# Altium PCB MSampler3.PcbDoc
Units mm, origin at the board's own origin, x right, y up, seen from the top; angles counter-clockwise.
Board outline 50 x 50 mm, 4 copper layers (Top Layer, GND, Signal Layer 1, Bottom Layer), stack 0.778 mm thick; 179 components, 104 nets, 572 pads, 261 vias.
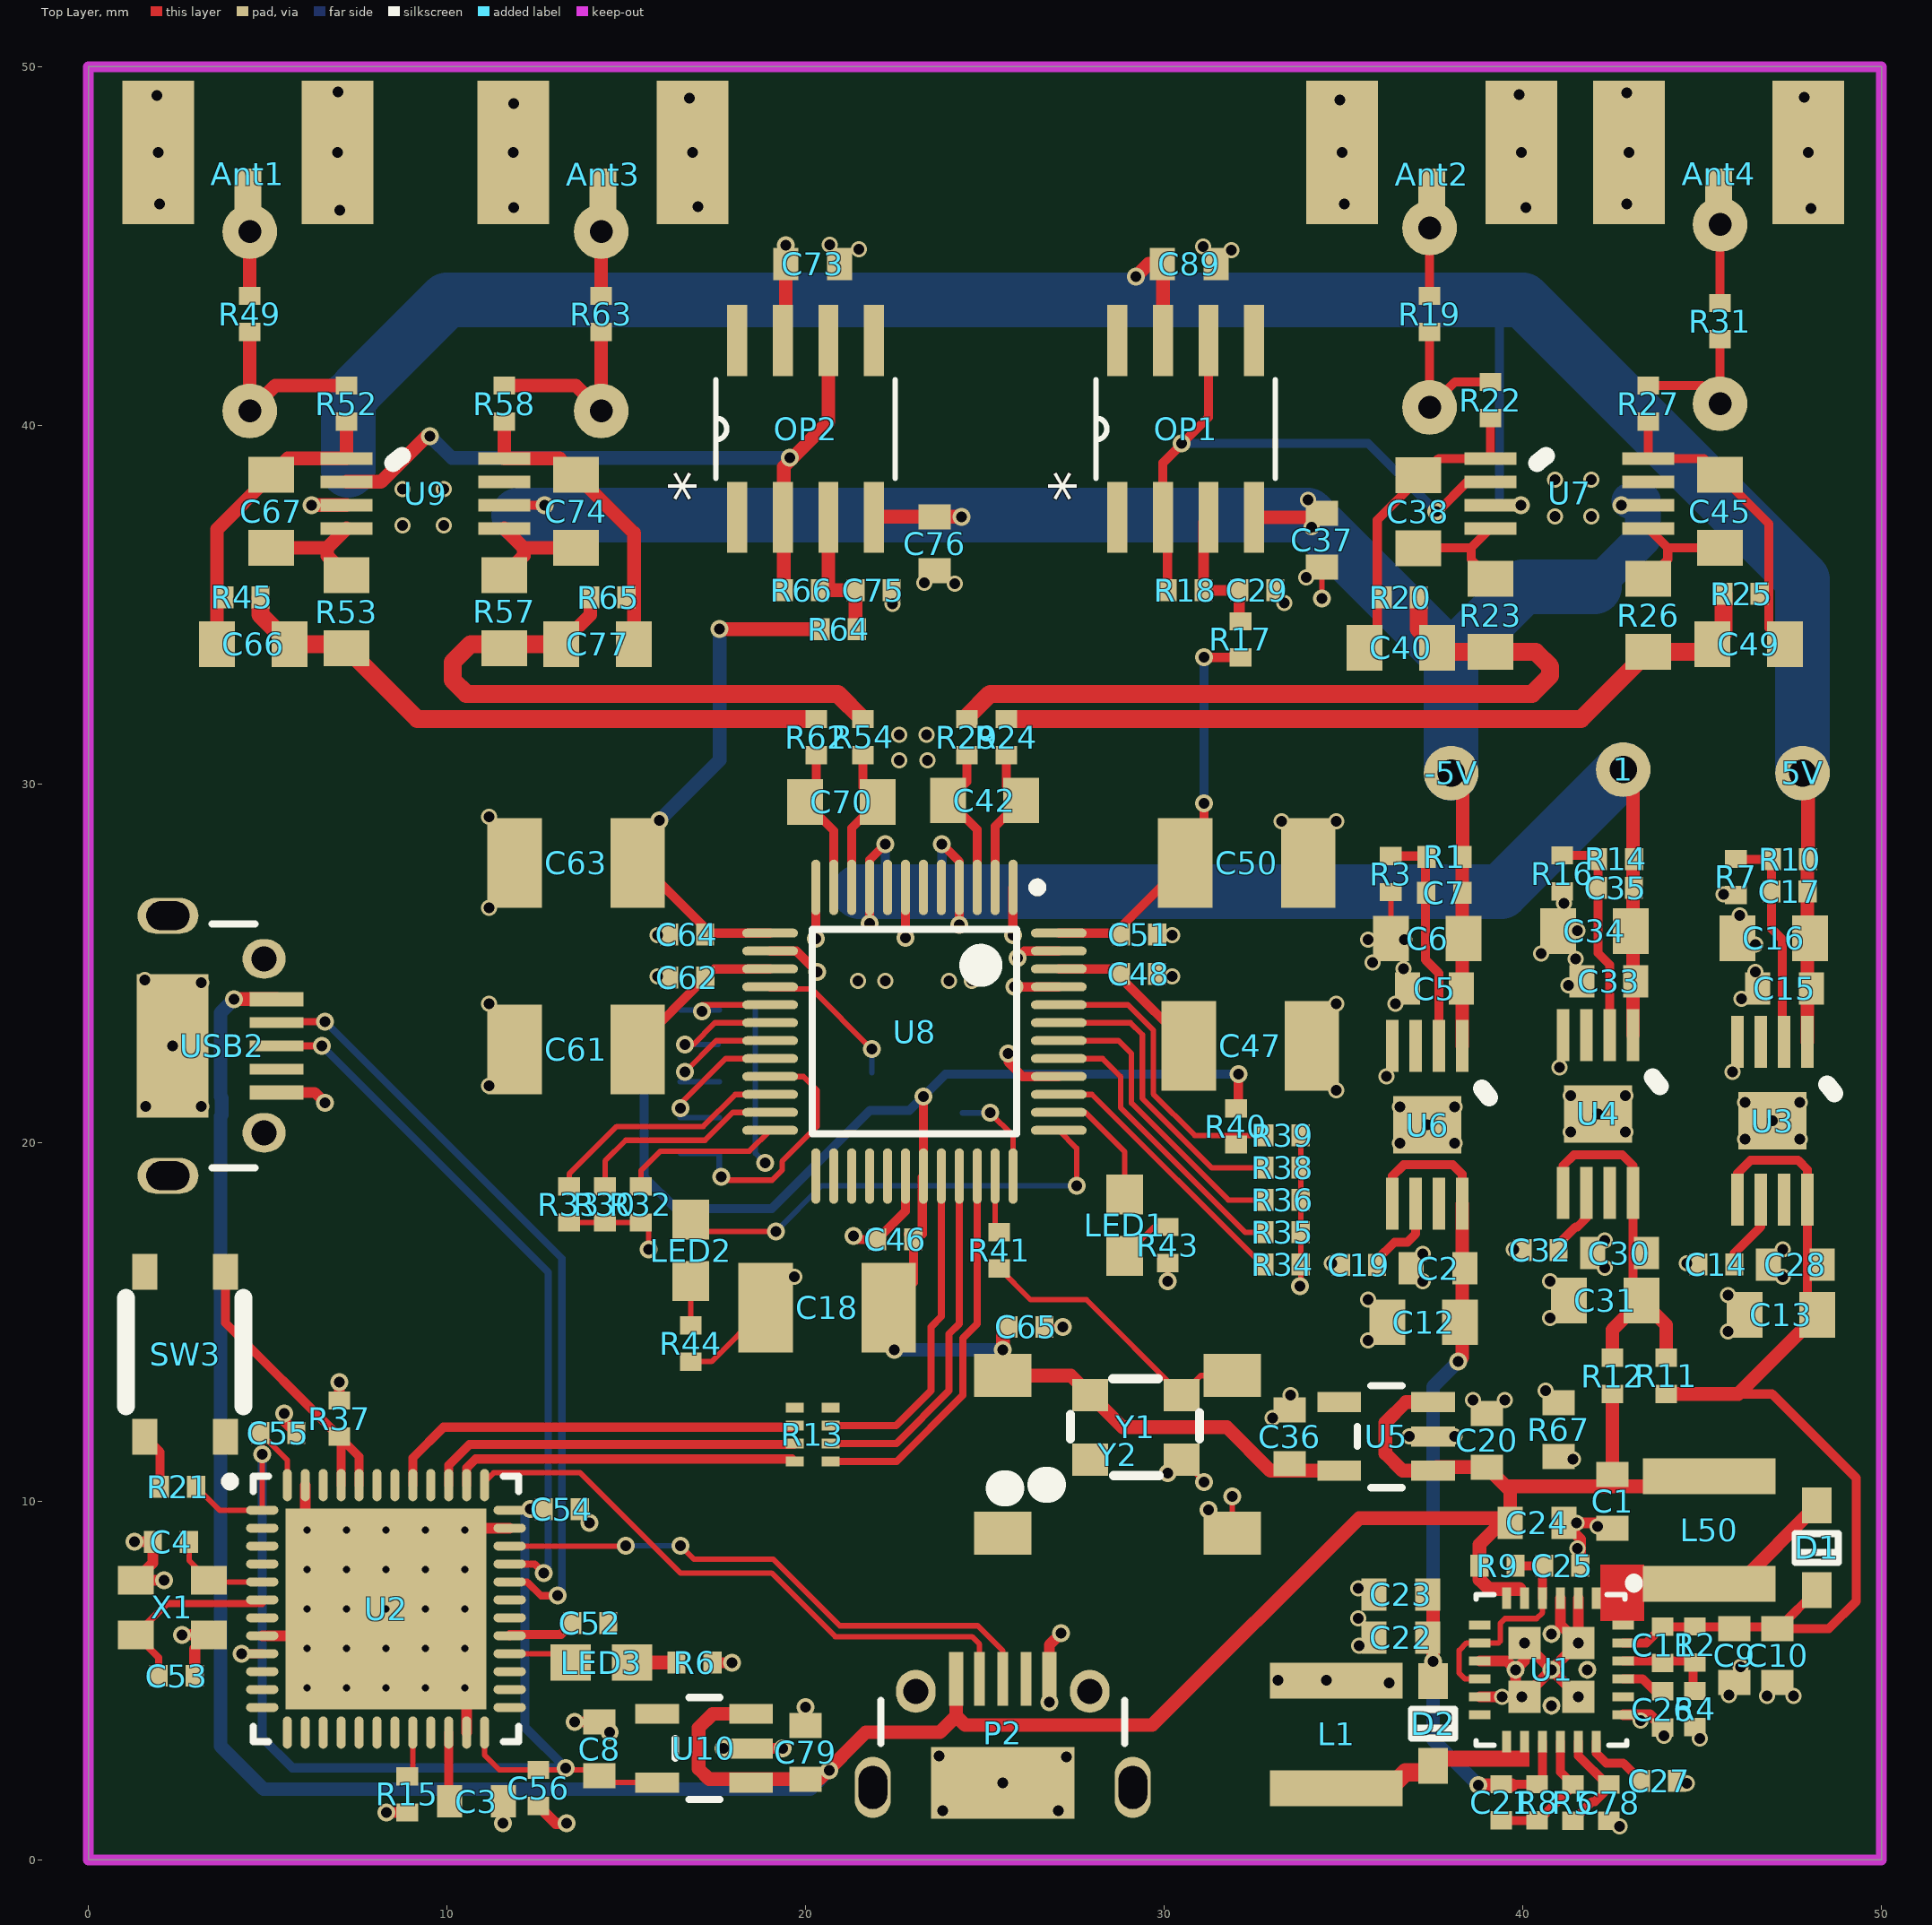
[diagram p0: Top Layer view]
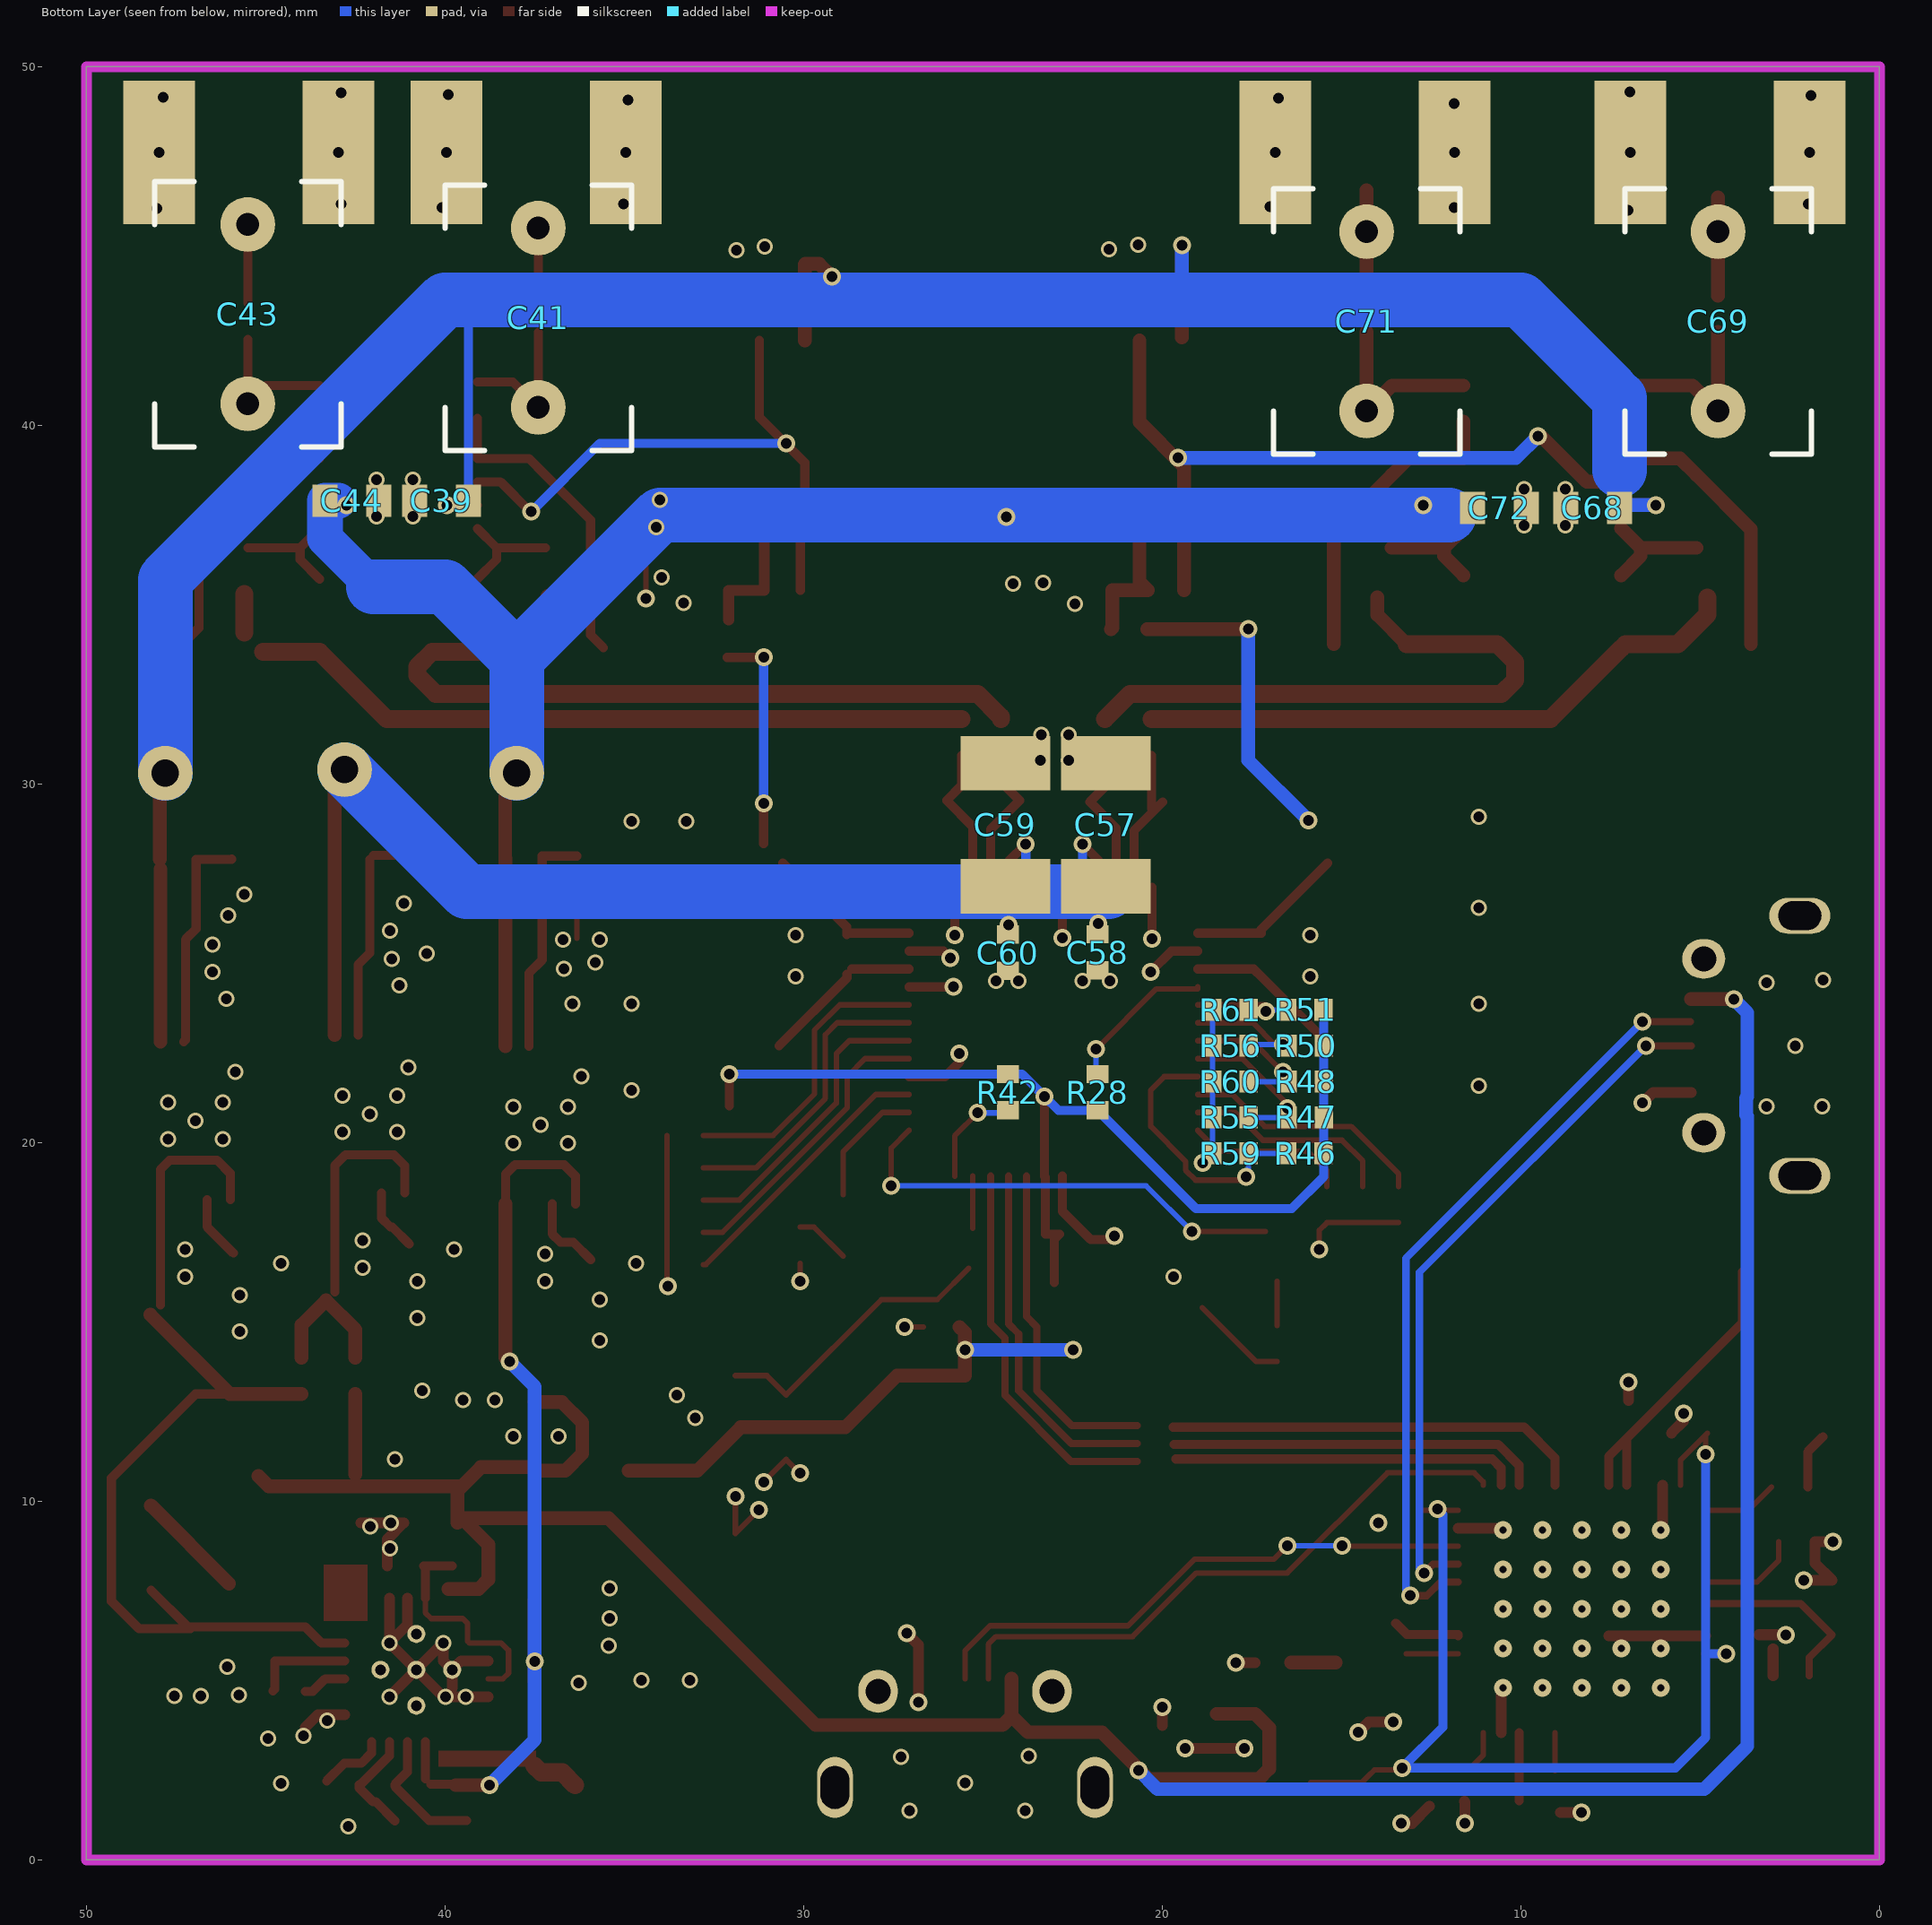
[diagram p1: Bottom Layer view, seen from below]
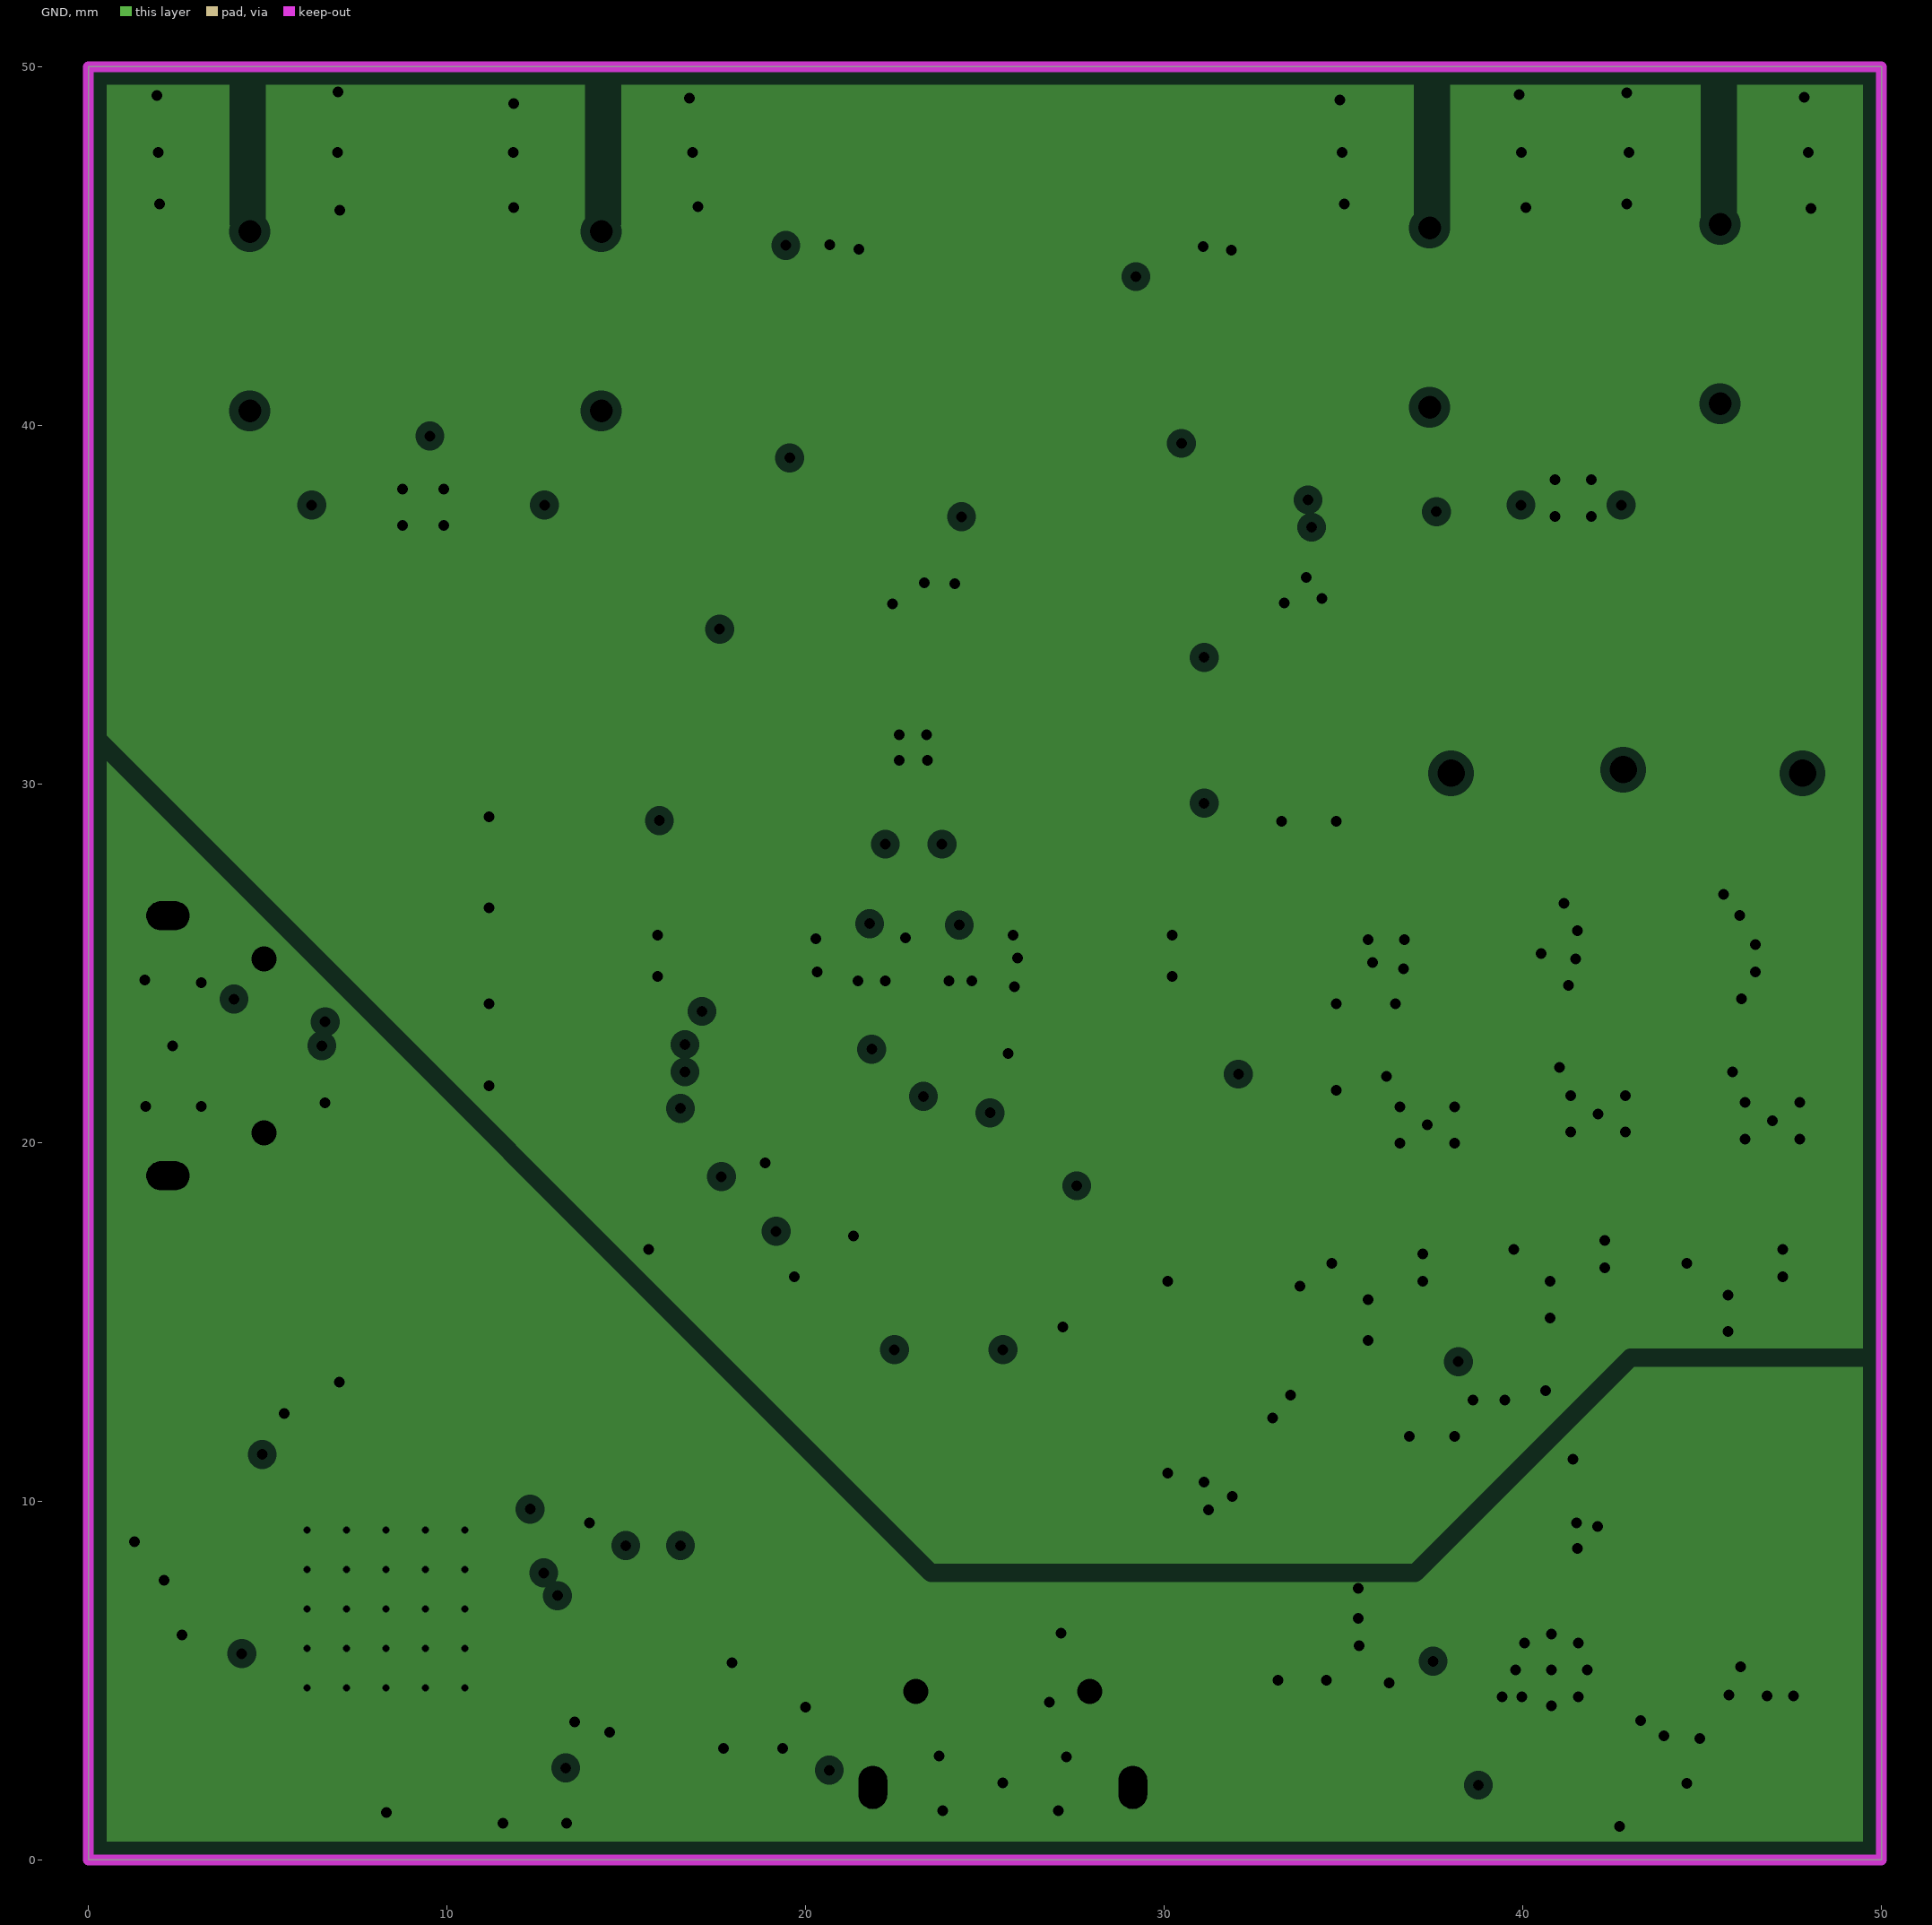
[diagram p2: GND, clearances drawn from the general rule]

## Layer stack, top to bottom
Top Solder: solder mask 0.0102, Solder Resist, Dk 3.5
Top Layer: signal copper 0.0356
Dielectric 1: core 0.254, FR-4, Dk 4.2
GND: plane copper 0.036, net (Multiple Nets)
Dielectric 3: prepreg 0.127, Dk 4.2
Signal Layer 1: signal copper 0.036
Dielectric 2: core 0.254, Dk 4.2
Bottom Layer: signal copper 0.0356
Bottom Solder: solder mask 0.0102, Solder Resist, Dk 3.5

## Board outline
0,0 50,0 50,50 0,50

## Design rules (kind name [scope] priority, off if disabled: settings)
Clearance Clearance_1 [(InNamedPolygon('Bottom Layer-No Net')) vs Not InNet('GND')] p1: gap=0.381 ignorepadtopadclearanceinfootprint=FALSE except(0: Arc-Hole Track-Hole SMDPad-Hole THPad-Hole Via-Hole Fill-Hole Poly-Hole Region-Hole Text-Hole)
Clearance [All] p2: gap=0.152 ignorepadtopadclearanceinfootprint=FALSE except(0: Arc-Hole Track-Hole SMDPad-Hole THPad-Hole Via-Hole Fill-Hole Poly-Hole Region-Hole Text-Hole)
DiffPairsRouting [All] p1: maxlimit=0.254 minlimit=0.254 mostfreqgap=0.254 toplayer_minwidth=0.152 toplayer_maxwidth=0.381 toplayer_prefwidth=0.381 midlayer1_minwidth=0.152 midlayer1_maxwidth=0.381 midlayer1_prefwidth=0.381 bottomlayer_minwidth=0.152 bottomlayer_maxwidth=0.381 bottomlayer_prefwidth=0.381 maxuncoupledlength=12.7
HoleSize [All] p1: absolutevalues=TRUE maxlimit=3.048 minlimit=0.025 maxpercent=80.000 minpercent=20.000
MinimumSolderMaskSliver [All] p1 off: minsoldermaskwidth=0.254
PlaneClearance [All] p1: clearance=0.254
PlaneConnect [All] p1: planeconnectstyle=Direct reliefexpansion=0.508 reliefentries=4 reliefconductorwidth=0.254 reliefairgap=0.254
PolygonConnect [All] p1: connectstyle=Direct reliefconductorwidth=0.254 reliefentries=4 polygonreliefangle="90 Angle" airgapwidth=0.254
RoomDefinition audio [InComponentClass('audio')] p1 off: confinementstyle=ConfineIn formatcopy=TRUE lockcomponents=FALSE outline -64.756,5.138 -51.756,5.138 -51.756,14.888 -64.756,14.888
RoomDefinition power [InComponentClass('power')] p2 off: confinementstyle=ConfineIn formatcopy=TRUE lockcomponents=FALSE outline -64.756,23.388 -37.006,23.388 -37.006,30.638 -64.756,30.638
RoomDefinition MCU [InComponentClass('MCU')] p3 off: confinementstyle=ConfineIn formatcopy=TRUE lockcomponents=FALSE outline -52.252,5.894 7.311,5.894 7.311,11.99 -52.252,11.99
RoutingVias [All] p1: holewidth=0.305 width=0.508 viastyle="Through Hole" minholewidth=0.3 minwidth=0.5 maxholewidth=0.711 maxwidth=1.27
SilkToBoardRegionClearance [All] p1 off:
SilkToSilkClearance [All] p1 off: silktosilkclearance=0.254
SilkToSolderMaskClearance [IsPad] p1 off: minsilkscreentomaskgap=0.254 clearancetoexposedcopper=TRUE
SolderMaskExpansion [All] p1: expansion=0.102
Width [All] p1: maxlimit=1.524 minlimit=0.152 preferedwidth=0.152
22 further rules are at their usual default settings.

## Classes and differential pairs
component class audio: Ant1 Ant2 Ant3 Ant4 C18 C29 C37 C38 C39 C40 C41 C42 C43 C44 C45 C46 C47 C48 C49 C50 C51 C57 C58 C59 C60 C61 C62 C63 C64 C65 C66 C67 C68 C69 C70 C71 C72 C73 C74 C75 C76 C77 C89 LED1 LED2 OP1 OP2 R13 R17 R18 R19 R20 R22 R23 R24 R25 R26 R27 R28 R29 R30 R31 R32 R33 R34 R35 R36 R38 R39 R40 R41 R42 R43 R44 R45 R46 R47 R48 R49 R50 R51 R52 R53 R54 R55 R56 R57 R58 R59 R60 R61 R62 R63 R64 R65 R66 U7 U8 U9 Y1 Y2
component class MCU: C3 C4 C52 C53 C54 C55 C56 LED3 P2 R6 R15 R21 R37 SW3 U2 USB2 X1
component class power: 1 5V -5V C1 C2 C5 C6 C7 C8 C9 C10 C11 C12 C13 C14 C15 C16 C17 C19 C20 C21 C22 C23 C24 C25 C26 C27 C28 C30 C31 C32 C33 C34 C35 C36 C78 C79 D1 D2 L1 L50 R1 R2 R3 R4 R5 R7 R8 R9 R10 R11 R12 R14 R16 R67 U1 U3 U4 U5 U6 U10

## Components (designator, comment, footprint, x,y, rotation, side; value= is the part's Value field where it differs from the comment)
1 "TestPad" TestPad 42.8,30.4 r90 top
5V "TestPad" TestPad 47.8,30.3 r0 top
-5V "TestPad" TestPad 38,30.3 r90 top
Ant1 "Antenna" SMA-2C 4.445,46.406 r180 top
Ant2 "Antenna" SMA-2C 37.465,46.406 r180 top
Ant3 "Antenna" SMA-2C 14.351,46.406 r180 top
Ant4 "Antenna" SMA-2C 45.466,46.406 r180 top
C1 "10uF" 0603L 42.5,10 r270 top
C2 "0.1uF" 0603L 37.638,16.492 r180 top
C3 "Cap" 0603L 10.823,1.628 r180 top value=4.7uF
C4 "Cap" 0402 2.3,8.869 r0 top value=20pF
C5 "0.1uF" 0603L 37.538,24.292 r180 top
C6 "10uF" 0805 37.338,25.692 r0 top
C7 "10nF" 0402 37.814,26.967 r180 top
C8 "4.7uF" 0603L 14.249,3.093 r270 top
C9 "10uF" 0603L 45.9,5.7 r270 top
C10 "10uF" 0603L 47.1,5.7 r270 top
C11 "10nF" 0402 43.9,6 r270 top
C12 "10uF" 0805 37.238,14.992 r0 top
C13 "10uF" 0805 47.2,15.2 r0 top
C14 "10nF" 0402 45.4,16.6 r180 top
C15 "0.1uF" 0603L 47.3,24.3 r180 top
C16 "10uF" 0805 47,25.7 r0 top
C17 "10nF" 0402 47.446,27 r180 top
C18 "220uF,Tan" 1210 20.6,15.4 r0 top
C19 "10nF" 0402 35.438,16.592 r180 top
C20 "4.7uF" 0603L 39,11.7 r270 top
C21 "4.7nF" 0402 39.4,1.6 r90 top
C22 "10uF" 0603L 36.6,6.2 r180 top
C23 "10uF" 0603L 36.6,7.4 r180 top
C24 "10uF" 0603L 40.4,9.4 r0 top
C25 "0.1uF" 0402 41.1,8.2 r0 top
C26 "10nF" 0402 43.9,4.2 r270 top
C27 "4.7nF" 0402 43.8,2.2 r0 top
C28 "0.1uF" 0603L 47.6,16.6 r180 top
C29 "1uF" 0402 32.6,35.4 r180 top
C30 "0.1uF" 0603L 42.697,16.916 r180 top
C31 "10uF" 0805 42.3,15.6 r0 top
C32 "10nF" 0402 40.5,17 r180 top
C33 "0.1uF" 0603L 42.4,24.5 r180 top
C34 "10uF" 0805 42,25.9 r0 top
C35 "10nF" 0402 42.6,27.1 r180 top
C36 "4.7uF" 0603L 33.5,11.8 r270 top
C37 "1uF" 0603L 34.4,36.8 r90 top
C38 "1nF" 0805 37.084,37.592 r90 top
C39 "1uF" 0603L 40.1,37.9 r180 bottom
C40 "NC" 0805 36.6,33.8 r180 top
C41 "10uF" CL21-5mm-1F 37.4,43 r90 bottom
C42 "2.7nF" 0805 24.993,29.541 r180 top
C43 "10uF" CL21-5mm-1F 45.5,43.1 r90 bottom
C44 "1uF" 0603L 42.6,37.9 r0 bottom
C45 "1nF" 0805 45.5,37.6 r90 top
C46 "1uF" 0402 22.5,17.3 r0 top
C47 "220uF,Tan" 1210 32.4,22.7 r0 top
C48 "1uF" 0402 29.3,24.7 r180 top
C49 "NC" 0805 46.3,33.9 r0 top
C50 "220uF,Tan" 1210 32.3,27.8 r180 top
C51 "1uF" 0402 29.3,25.8 r0 top
C52 "1nF" 0402 14,6.6 r180 top
C53 "Cap" 0402 2.466,5.133 r180 top value=20pF
C54 "Cap" 0402 13.208,9.779 r180 top value=0.1uF
C55 "Cap" 0402 5.3,11.9 r180 top value=0.1uF
C56 "Cap" 0402 12.55,2 r90 top value=0.1uF
C57 "220uF,Tan" 1210 21.573,28.865 r90 bottom
C58 "1uF" 0402 21.8,25.3 r90 bottom
C59 "220uF,Tan" 1210 24.373,28.865 r270 bottom
C60 "1uF" 0402 24.3,25.3 r270 bottom
C61 "220uF,Tan" 1210 13.6,22.6 r180 top
C62 "1uF" 0402 16.7,24.6 r0 top
C63 "220uF,Tan" 1210 13.6,27.8 r0 top
C64 "1uF" 0402 16.7,25.8 r180 top
C65 "1uF" 0402 26.162,14.859 r180 top
C66 "NC" 0805 4.6,33.9 r180 top
C67 "1nF" 0805 5.1,37.6 r90 top
C68 "1uF" 0603L 8,37.7 r180 bottom
C69 "10uF" CL21-5mm-1F 4.5,42.9 r90 bottom
C70 "2.7nF" 0805 21,29.5 r180 top
C71 "10uF" CL21-5mm-1F 14.3,42.9 r90 bottom
C72 "1uF" 0603L 10.6,37.7 r0 bottom
C73 "1uF" 0603L 20.2,44.5 r180 top
C74 "1nF" 0805 13.6,37.6 r90 top
C75 "1uF" 0402 21.9,35.4 r180 top
C76 "1uF" 0603L 23.6,36.7 r90 top
C77 "NC" 0805 14.2,33.9 r0 top
C78 "220nF" 0402 42.4,1.6 r270 top
C79 "4.7uF" 0603L 20,3 r270 top
C89 "1uF" 0603L 30.7,44.5 r180 top
D1 "" LC-SOD-323 48.2,8.7 r90 top
D2 "" LC-SOD-323 37.5,3.8 r90 top
L1 "2.2uH" L4015 34.8,2 r90 top
L50 "2.2uH" L4015 45.2,10.7 r270 top
LED1 "LED0" 0603 28.9,17.7 r270 top
LED2 "LED0" 0603 16.8,17 r270 top
LED3 "LED0" 0603 14.3,5.5 r0 top
OP1 "OP-SO8" D8 30.6,39.9 r90 top
OP2 "OP-SO8" D8 20,39.9 r90 top
P2 "SWD_MicroUSB" MICRO-YZX 25.5,-0.8 r0 top
R1 "17k" 0402 37.814,27.967 r0 top
R2 "17k" 0402 44.8,6 r90 top
R3 "10k" 0402 36.322,27.483 r90 top
R4 "17k" 0402 44.8,4.2 r90 top
R5 "17k" 0402 41.4,1.6 r270 top
R6 "10k" 0402 16.9,5.5 r0 top value=0Ohm
R7 "10k" 0402 45.946,27.4 r90 top
R8 "17k" 0402 40.4,1.6 r90 top
R9 "100R" 0402 39.3,8.2 r180 top
R10 "17k" 0402 47.446,27.9 r0 top
R11 "NC" 0402 44,13.5 r270 top
R12 "0R" 0402 42.5,13.5 r270 top
R13 "Res*4" 0402X4 20.193,11.862 r180 top value=200Ohm
R14 "17k" 0402 42.6,27.9 r0 top
R15 "10k" 0402 8.892,1.831 r270 top value=0Ohm
R16 "10k" 0402 41.1,27.5 r90 top
R17 "1k" 0402 32.131,34.036 r270 top
R18 "NC" 0402 30.6,35.4 r180 top
R19 "0R" 0402 37.4,43.1 r90 top value=0Ohm
R20 "270R" 0402 36.6,35.2 r180 top value=0Ohm
R21 "1k" 0402 2.5,10.4 r0 top value=0Ohm
R22 "560R" 0402 39.1,40.7 r90 top value=0Ohm
R23 "40.2R" 0805 39.1,34.7 r90 top
R24 "0R" 0402 25.6,31.3 r90 top
R25 "1.33k" 0402 46.1,35.3 r0 top value=0Ohm
R26 "40.2R" 0805 43.5,34.7 r90 top
R27 "560R" 0402 43.5,40.6 r90 top value=0Ohm
R28 "10k" 0402 21.8,21.4 r90 bottom
R29 "0R" 0402 24.5,31.3 r90 top
R30 "10k" 0402 14.408,18.27 r90 top
R31 "0R" 0402 45.5,42.9 r90 top value=0Ohm
R32 "10k" 0402 15.408,18.27 r90 top
R33 "10k" 0402 13.408,18.27 r90 top
R34 "10k" 0402 33.3,16.6 r0 top value=0Ohm
R35 "10k" 0402 33.3,17.5 r0 top value=0Ohm
R36 "10k" 0402 33.3,18.4 r0 top value=0Ohm
R37 "Res2" 0402 7,12.3 r90 top value=10k
R38 "10k" 0402 33.3,19.3 r0 top value=0Ohm
R39 "10k" 0402 33.3,20.2 r0 top value=0Ohm
R40 "10k" 0402 32.004,20.447 r90 top value=0Ohm
R41 "100R" 0402 25.4,17 r270 top value=0Ohm
R42 "10k" 0402 24.3,21.4 r90 bottom value=0Ohm
R43 "10k" 0402 30.099,17.145 r270 top value=0Ohm
R44 "10k" 0402 16.8,14.4 r270 top value=0Ohm
R45 "270R" 0402 4.3,35.2 r180 top value=0Ohm
R46 "NC" 0402 16,19.7 r0 bottom value=0Ohm
R47 "NC" 0402 16,20.7 r180 bottom value=0Ohm
R48 "NC" 0402 16,21.7 r180 bottom value=0Ohm
R49 "0R" 0402 4.5,43.1 r90 top value=0Ohm
R50 "NC" 0402 16,22.7 r180 bottom value=0Ohm
R51 "NC" 0402 16,23.7 r0 bottom value=0Ohm
R52 "560R" 0402 7.2,40.6 r90 top value=0Ohm
R53 "40.2R" 0805 7.2,34.8 r90 top
R54 "0R" 0402 21.6,31.3 r90 top
R55 "10k" 0402 18.1,20.7 r180 bottom value=0Ohm
R56 "10k" 0402 18.1,22.7 r180 bottom value=0Ohm
R57 "40.2R" 0805 11.6,34.8 r90 top
R58 "560R" 0402 11.6,40.6 r90 top value=0Ohm
R59 "10k" 0402 18.1,19.7 r180 bottom value=0Ohm
R60 "10k" 0402 18.1,21.7 r180 bottom value=0Ohm
R61 "10k" 0402 18.1,23.7 r180 bottom value=0Ohm
R62 "0R" 0402 20.3,31.3 r90 top
R63 "0R" 0402 14.3,43.1 r90 top value=0Ohm
R64 "1k" 0402 20.93,34.315 r180 top
R65 "1.33k" 0402 14.5,35.2 r0 top value=0Ohm
R66 "NC" 0402 19.9,35.4 r180 top
R67 "FB" 0603L 41,12 r270 top
SW3 "SW-PB" SW3x4 2.7,14.1 r270 top
U1 "TPS65130" TPS65130 40.8,5.3 r270 top
U2 "STM32F401CCU6" STM-UFQFPN48_N 8.3,7 r0 top
U3 "tps7a3001" MSOP8/VSSOP8+PAD 46.962,20.608 r270 top
U4 "tps7a3001" MSOP8/VSSOP8+PAD 42.1,20.8 r270 top
U5 "LP5907" SOT23-5 36.2,11.8 r90 top
U6 "tps7a3001" MSOP8/VSSOP8+PAD 37.338,20.492 r270 top
U7 "DiffAmp-OPA1632" MSOP8/VSSOP8 41.3,38.1 r0 top
U8 "PCM4222-FUNC" PCM4222 23.037,23.091 r270 top
U9 "DiffAmp-OPA1632" MSOP8/VSSOP8 9.4,38.1 r0 top
U10 "LP5907" SOT23-5 17.181,3.106 r90 top
USB2 "USB Micro Type B" MICRO-YZX -0.6,22.7 r270 top
X1 "24.000 KHz 3.2x2.5mm 8-10pf" OSCILLATOR-2.5x2.0 2.339,7.038 r180 top
Y1 "OSC3225" TXC_7Q 29.21,12.065 r0 top
Y2 "OSC7050" OSC7050 28.702,11.303 r0 top

## Footprints (in the part's own frame and the unit in brackets; to place one, negate y for a bottom-side part, rotate by r counter-clockwise, add the part's x,y. Pads: shape width x height; smd on the part's side, far side on the other; paste and mask are expansions set on the pad)
0402 [mil] "0402-RES"
  rect 20x24 smd: 1(-19.69,0) 2(20,0)
0402X4 [mm]
  rect 0.5x0.28 smd: 1(-0.5,0.75) 2(-0.5,0.25) 3(-0.5,-0.25) 4(-0.5,-0.75) 5(0.5,-0.75) 6(0.5,-0.25) 7(0.5,0.25) 8(0.5,0.75)
0603 [mil] "0603-RES"
  rect 44x40 smd: 1(-33.46,0) 2(34,0)
  body extent -31,-16 31,16, height 31
0603L [mm]
  rect 0.7x0.9 smd: 1(-0.75,0) 2(0.75,0)
  body extent -0.8,-0.4 0.8,0.4, height 0.8
0805 [mm]
  rect 1x1.27 smd: 1(-1.016,0) 2(1.016,0)
  body extent -1.27,-0.76 1.27,0.76, height 0.8
1210 [mm]
  rect 1.52x2.5 smd: 1(-1.715,0) 2(1.715,0)
CL21-5mm-1F [mil]
  round 60 hole 25: 1(-98.43,0) 2(98.43,0)
  silkscreen extent -146,-102 146,102, body extent -142,-98 142,98, height 394
D8 [mil]
  rect 78x22 smd: 1(-97,75) 2(-97,25) 3(-97,-25) 4(-97,-75) 5(97,-75) 6(97,-25) 7(97,25) 8(97,75)
  silkscreen extent -54,-98 54,98, body extent -118,-96 118,96, height 64
L4015 [mm]
  rect 1x3.7 smd: 1(0,0) 2(3,0)
LC-SOD-323 [mm]
  rect 1x0.83 smd: 1(1.18,0) 2(-1.18,0)
  silkscreen extent -0.4,-0.6 0.4,0.6, body extent -1.35,-0.62 1.35,0.63, height 1.1
MICRO-YZX [mm]
  rect 0.4x1.5 smd: 1(-1.3,5.85) 5(1.3,5.85)
  rect 0.3x1.5 smd: 2(-0.65,5.85) 3(0,5.85) 4(0.65,5.85)
  oval 1x1.7 hole 0.8 slot 1.2 at 90 deg: 5(-3.625,2.82) 5(3.625,2.82)
  oval 1.1x1.2 hole 0.7: 5(-2.425,5.5) 5(2.425,5.5)
  rect 4x2 smd: 5(0,2.95)
  silkscreen extent -3.4,4.05 3.4,5.25, body extent -4.02,0.33 3.98,5.93, height 2.6
MSOP8/VSSOP8 [mm]
  rect 1.45x0.35 smd: 1(-2.2,0.975) 2(-2.2,0.325) 3(-2.2,-0.325) 4(-2.2,-0.975) 5(2.2,-0.975) 6(2.2,-0.325) 7(2.2,0.325) 8(2.2,0.975)
  silkscreen extent -0.9,0.85 -0.65,1.05
MSOP8/VSSOP8+PAD [mm]
  rect 1.6x1.9 smd: 0(0,0)
  rect 1.45x0.35 smd: 1(-2.2,0.975) 2(-2.2,0.325) 3(-2.2,-0.325) 4(-2.2,-0.975) 5(2.2,-0.975) 6(2.2,-0.325) 7(2.2,0.325) 8(2.2,0.975)
  silkscreen extent -1.02,1.52 -0.77,1.72
OSC7050 [mm]
  rect 1.6x1.2 smd: 1(-3.2,-2.2) 2(3.2,-2.2) 3(3.2,2.2) 4(-3.2,2.2)
  silkscreen extent -3.18,-0.95 -3.1,-0.95, body extent -3.75,-2.5 3.75,2.5, height 1.5
OSCILLATOR-2.5x2.0 [mm] "OSCILLATOR-3.2X2.5"
  rect 1x0.8 smd: 1(-1.016,-0.762) 2(1.016,-0.762) 3(1.016,0.762) 4(-1.016,0.762)
  body extent -1.27,-1.02 1.27,1.02, height 0.9
PCM4222 [mm] "QFP, 48-Leads, Body 7x7mm, Pitch 0.5mm, IPC High Density"
  oval 1.55x0.25 smd: 1(-4.025,2.75) 2(-4.025,2.25) 3(-4.025,1.75) 4(-4.025,1.25) 5(-4.025,0.75) 6(-4.025,0.25) 7(-4.025,-0.25) 8(-4.025,-0.75) 9(-4.025,-1.25) 10(-4.025,-1.75) 11(-4.025,-2.25) 12(-4.025,-2.75) 25(4.025,-2.75) 26(4.025,-2.25) 27(4.025,-1.75) 28(4.025,-1.25) 29(4.025,-0.75) 30(4.025,-0.25) 31(4.025,0.25) 32(4.025,0.75) 33(4.025,1.25) 34(4.025,1.75) 35(4.025,2.25) 36(4.025,2.75)
  oval 0.25x1.55 smd: 13(-2.75,-4.025) 14(-2.25,-4.025) 15(-1.75,-4.025) 16(-1.25,-4.025) 17(-0.75,-4.025) 18(-0.25,-4.025) 19(0.25,-4.025) 20(0.75,-4.025) 21(1.25,-4.025) 22(1.75,-4.025) 23(2.25,-4.025) 24(2.75,-4.025) 37(2.75,4.025) 38(2.25,4.025) 39(1.75,4.025) 40(1.25,4.025) 41(0.75,4.025) 42(0.25,4.025) 43(-0.25,4.025) 44(-0.75,4.025) 45(-1.25,4.025) 46(-1.75,4.025) 47(-2.25,4.025) 48(-2.75,4.025)
  silkscreen extent -4.15,-2.85 2.85,3.55, body extent -3.5,-3.5 3.5,3.5, height 1.6
SMA-2C [mm]
  rect 0.75x1.5 smd: 1(0,0)
  rect 2x4 smd: GND(-2.5,-1.2) GND(2.5,-1.2)
  rect 2x4 smd far side: GND(-2.5,-1.2) GND(2.5,-1.2)
  Top Layer pour cut-out: -1.5,0.8 1.5,0.8 1.5,-3.2 -1.5,-3.2
  GND region: -0.5,0.816 -0.5,-3.248 0.5,-3.248 0.5,0.816
SOT23-5 [mil] "SOT23-5"
  rect 22x48 smd: 1(-37.4,-51.19) 2(0,-51.19) 3(38,-51.19) 4(38,52) 5(-37.4,52)
  silkscreen extent -56,-17 56,32, body extent -57,-55 57,55, height 47
STM-UFQFPN48_N [mm] "QFN, 48-Leads, Body 7.1x7.1mm, Pitch 0.5mm, Thermal Pad 5.6x5.6mm, IPC Medium Density"
  oval 0.9x0.25 smd: 1(-3.45,2.75) 2(-3.45,2.25) 3(-3.45,1.75) 4(-3.45,1.25) 5(-3.45,0.75) 6(-3.45,0.25) 7(-3.45,-0.25) 8(-3.45,-0.75) 9(-3.45,-1.25) 10(-3.45,-1.75) 11(-3.45,-2.25) 12(-3.45,-2.75) 25(3.45,-2.75) 26(3.45,-2.25) 27(3.45,-1.75) 28(3.45,-1.25) 29(3.45,-0.75) 30(3.45,-0.25) 31(3.45,0.25) 32(3.45,0.75) 33(3.45,1.25) 34(3.45,1.75) 35(3.45,2.25) 36(3.45,2.75)
  oval 0.25x0.9 smd: 13(-2.75,-3.45) 14(-2.25,-3.45) 15(-1.75,-3.45) 16(-1.25,-3.45) 17(-0.75,-3.45) 18(-0.25,-3.45) 19(0.25,-3.45) 20(0.75,-3.45) 21(1.25,-3.45) 22(1.75,-3.45) 23(2.25,-3.45) 24(2.75,-3.45) 37(2.75,3.45) 38(2.25,3.45) 39(1.75,3.45) 40(1.25,3.45) 41(0.75,3.45) 42(0.25,3.45) 43(-0.25,3.45) 44(-0.75,3.45) 45(-1.25,3.45) 46(-1.75,3.45) 47(-2.25,3.45) 48(-2.75,3.45)
  rect 5.6x5.6 smd: 49(0,0)
  silkscreen extent -4.47,-3.7 3.7,3.7, body extent -3.55,-3.55 3.55,3.55, height 0.6
SW3x4 [mm]
  rect 1x0.7 smd: 1(-2.3,1.125) 2(2.3,-1.125) 3(2.3,1.125) 4(-2.3,-1.125)
  silkscreen extent -1.58,-1.65 1.45,1.63, body extent -2,-1.5 2,1.5, height 2.6
TestPad [mil]
  round 60 hole 30: 1(0,0)
TPS65130 [mm]
  round 0.5 hole 0.3: 0(-1,0) 0(0,1) 0(0,0) 0(0,-1) 0(1,0)
  rect 0.9x0.9 smd: 0(-0.75,0.75) 0(-0.75,-0.75) 0(0.75,0.75) 0(0.75,-0.75)
  rect 0.6x0.25 smd: 1(-2,1.25) 2(-2,0.75) 3(-2,0.25) 4(-2,-0.25) 5(-2,-0.75) 6(-2,-1.25) 13(2,-1.25) 14(2,-0.75) 15(2,-0.25) 16(2,0.25) 17(2,0.75) 18(2,1.25)
  rect 0.25x0.6 smd: 7(-1.25,-2) 8(-0.75,-2) 9(-0.25,-2) 10(0.25,-2) 11(0.75,-2) 12(1.25,-2) 19(1.25,2) 20(0.75,2) 21(0.25,2) 22(-0.25,2) 23(-0.75,2) 24(-1.25,2)
  silkscreen extent -2.42,-2.1 2.1,2.3, body extent -2,-2 2,2, height 1
TXC_7Q [mm]
  rect 1x0.9 smd: 1(-1.275,-0.9) 2(1.275,-0.9) 3(1.275,0.9) 4(-1.275,0.9)
  silkscreen extent -2.52,-1.6 1.78,1.35

## Part data
C1 C2 C5 C6 C7 C8 C9 C10 C11 C12 C13 C14 C15 C16 C17 C18 C19 C20 C21 C22 C23 C24 C25 C26 C27 C28 C29 C30 C31 C32 C33 C34 C35 C36 C38 C40 C41 C42 C43 C45 C46 C47 C48 C49 C50 C51 C52 C57 C58 C59 C60 C61 C62 C63 C64 C65 C66 C67 C69 C70 C71 C74 C75 C77 C78 C79: library part Cap, "Capacitor"
  C1 C2 C5 C6 C7 C8 C9 C10 C11 C12 C13 C14 C15 C16 C17 C18 C19 C20 C21 C22 C23 C24 C25 C26 C27 C28 C30 C31 C32 C33 C34 C35 C36 C38 C40 C41 C42 C43 C45 C47 C49 C50 C57 C59 C61 C63 C66 C67 C69 C70 C71 C74 C77 C78 C79: LatestRevisionDate=17-Jul-2002, LatestRevisionNote="Re-released for DXP Platform.", PackageDescription="Radial Cap, Thru-Hole; 2 Leads; 0.3 in Pin Spacing", PackageReference=RAD-0.3, Published=8-Jun-2000, Publisher="Altium Limited"
C3 C4 C53 C54 C55 C56: "Capacitor", LatestRevisionDate=17-Jul-2002, LatestRevisionNote="Re-released for DXP Platform.", PackageDescription="Radial Cap, Thru-Hole; 2 Leads; 0.3 in Pin Spacing", PackageReference=RAD-0.3, Published=8-Jun-2000, Publisher="Altium Limited"
C37 C39 C44 C68 C72 C73 C76 C89: library part CAP0402-CAP, "<b>Capacitor</b> / Standard 0603 ceramic capacitor, and 0.1\" leaded capacitor.", PARTNO=CC0402ZRY5V7BB104
D1 D2: library part "Diode 1N4148", "High Conductance Fast Diode", Code_JEDEC=DO-204-AH, ComponentLink1Description="Manufacturer Link", ComponentLink1URL=http://www.fairchildsemi.com/, ComponentLink2Description=Datasheet, ComponentLink2URL=http://www.fairchildsemi.com/ds/1N%2F1N4148.pdf, DatasheetVersion=1997, LatestRevisionDate=17-Jul-2002, LatestRevisionNote="Re-released for DXP Platform.", PackageDescription="Diode, Axial; Body 3.8 x 1.9 mm (LxDia. max), Lead Dia. 0.53 mm (max)", PackageReference=DO-35, Published=8-Jun-2000, Publisher="Altium Limited"
L1 L50: library part Inductor, "Inductor", Code_IEC=1005, Code_JEITA=0402, LatestRevisionDate=29-May-2009, LatestRevisionNote="IPC-7351 Footprint Added.", PackageDescription="Chip Inductor", PackageReference=0402-A, Published=8-Jun-2000, Publisher="Altium Limited"
LED1 LED2 LED3: "Typical INFRARED GaAs LED", LatestRevisionDate=08-Jul-2005, LatestRevisionNote="Mech Layer 1 removed.", PackageDescription="LED; 2 Leads", PackageReference=LED-0, Published=8-Jun-2000, Publisher="Altium Limited"
P2: "Connector SMD USB Micro Type B middle mount", Manufacturer 1="Molex Inc", Package / Case=SMD, Supplier Part Number 1=WM17142CT-ND, SCDType=undef, Supplier 1=Digi-Key
R1 R2 R3 R4 R5 R6 R7 R8 R9 R10 R11 R12 R14 R15 R16 R17 R18 R19 R20 R21 R22 R23 R24 R25 R26 R27 R28 R29 R30 R31 R32 R33 R34 R35 R36 R38 R39 R40 R41 R42 R43 R44 R45 R46 R47 R48 R49 R50 R51 R52 R53 R54 R55 R56 R57 R58 R59 R60 R61 R62 R63 R64 R65 R66 R67: library part Res2, "Resistor", LatestRevisionDate=17-Jul-2002, LatestRevisionNote="Re-released for DXP Platform.", PackageDescription="Axial Device, Thru-Hole; 2 Leads; 0.4 in Pin Spacing", PackageReference=AXIAL-0.4, Published=8-Jun-2000, Publisher="Altium Limited"
R13 R37: "Resistor", LatestRevisionDate=17-Jul-2002, LatestRevisionNote="Re-released for DXP Platform.", PackageDescription="Axial Device, Thru-Hole; 2 Leads; 0.4 in Pin Spacing", PackageReference=AXIAL-0.4, Published=8-Jun-2000, Publisher="Altium Limited"
SW3: "Switch", LatestRevisionDate=17-Jul-2002, LatestRevisionNote="Re-released for DXP Platform.", PackageDescription="Switch; 2 Leads", PackageReference=SPST-2, Published=24-Mar-1999, Publisher="Altium Limited"
U2: "ARM Cortex-M4 32-bit MCU+FPU, 105 DMIPS, 256 kB Flash, 64 kB Internal RAM, 36 I/Os, 48-pin UFQFPN, -40 to 85 degC, Tray", I/Os (High Current)=36, Manufacturer=STMicroelectronics, Operating Frequency(F) (Processor speed) (MHz)=84, Supplier Part Number 1=19X6217, Supply Voltage(Vcc) max (V)=3.6, Supply Voltage(Vcc) min (V)=1.8, ComponentLink1Description="Manufacturer URL", ComponentLink1URL=http://www.st.com/web/en/home.html, ComponentLink2Description=Datasheet, ComponentLink2URL=http://www.st.com/st-web-ui/static/active/en/resource/technical/document/data_brief/DM00071938.pdf, ComponentLink3Description="Package Specification", ComponentLink3URL=http://www.st.com/st-web-ui/static/active/en/resource/technical/document/data_brief/DM00071938.pdf, Core="ARM Cortex-M4", DatasheetVersion="Rev. 1", FLASH Size (Prog) (kB)=256, Internal RAM Size (kB)=64, Mounting Technology="Surface Mount", PackageDescription="48-Pin Ultra Thin Fine Pitch Quad Flat No-Lead, 7 x 7 x 0.6 mm Body, 0.5 mm Pitch, Exposed Pad", PackageReference=UFQFPN48, PackageVersion="Rev. 1, 04/2013", Packing=Tray, PartNumber=STM32F401CCU6, Supplier 1=Newark, Supplier 2=Mouser, Supplier Part Number 2=511-STM32F401CCU6
U7 U9: library part DiffAmp
USB2: library part USB_Micro_TypeB, "Connector SMD USB Micro Type B middle mount", Manufacturer 1="Molex Inc", Manufacturer Part Number 1=47491-0001, Package / Case=SMD, Supplier Part Number 1=WM17142CT-ND, SCDType=undef, Supplier 1=Digi-Key
X1: library part OSCILLATOR-3.2X2.5, "Crystal Oscillator in 3.2x2.5 SMD"
Y1 Y2: library part OSC_40M

## Via types
v1: diameter 0.45, hole 0.3, Top Layer to Bottom Layer, 153 vias
v2: diameter 0.5, hole 0.3, Top Layer to Bottom Layer, 83 vias
v3: diameter 0.5, hole 0.2, Top Layer to Bottom Layer, 25 vias

## Nets (pads, with @x,y where several pads share a name; then routed paths per layer and width w, separated by ;. In a path a pad name is that pad's centre, name@x,y a point inside that pad or via, vN(x,y) a via of type N, cw(c..) or ccw(c..) an arc to the next point about the centre after c; other vN are vias at no path point)
3.3A: C18.2 C36.2 C46.2 C65.2 R28.1 R40.2 R42.2 R46.1 R47.2 R48.2 R50.2 R51.1 U5.5 U8.31 Y1.4 Y2.4 | length 44.7
  Top Layer w0.254: C18.2@23.008,16.093 C46.2 22.86,17.448 23.255,17.448 23.255,19.034 U8.31 v2(23.287,21.29) ; v2@32.004,21.844 v2(32.068,21.908) R40.2@32.068,21.019
  Top Layer w0.381: C65.2 25.502,14.707 v2(25.502,14.224) Y2.4 27.397,13.503 Y1.4 28.835,12.065 31.75,12.065 32.965,10.85 U5.5
  Bottom Layer w0.254: R51.1 R46.1 15.5,19.044 16.383,18.161 19.061,18.161 R28.1 22.898,20.9 v2(23.287,21.29) 23.906,21.908 R42.2 v2(32.068,21.908)
  Bottom Layer w0.381: v2(22.479,14.224) v2(25.502,14.224)
3.3D: C8.2 C54.2 C55.2 C56.2 R21.2 U2.1 U2.9 U2.24 U2.36 U2.48 U10.5 | length 38.4
  Top Layer w0.152: R21.2 3.658,9.75 U2.1 v2(4.85,11.303) C55.2@4.85,11.842 ; C55.2 C55.2@4.85,11.842 ; U2.48 5.55,11.142 C55.2@4.85,11.842 ; U2.24 11.05,2.92 11.462,2.508 C56.2 14.084,2.508 C8.2 14.436,2.156 U10.5 ; U2.36 C54.2@12.842,9.75
  Top Layer w0.254: v2(4.277,5.75) U2.9
  Bottom Layer w0.254: v2(4.277,5.75) 4.79,5.75 ; v2(4.85,11.303) 4.85,3.405 5.691,2.564 v2(13.311,2.564) 12.171,3.704 12.171,9.631 v2(12.319,9.779)
4V: 1.1 C33.1 C34.2 C35.1 C57.1 C58.2 C59.2 C60.1 R14.2 U4.1 U8.4 U8.9 | length 35.8
  Top Layer w0.254: v2(21.787,26.105) U8.9 21.787,27.883 v2(22.225,28.321) ; v2(23.804,28.321) 24.287,27.838 U8.4 v2(24.287,26.065)
  Top Layer w0.381: U4.1 1.1@43.075,30.125
  Bottom Layer w0.254: C57.1@22.225,27.802 v2(22.225,28.321) ; C59.2@23.804,27.719 v2(23.804,28.321)
  Bottom Layer w1.524: C57.1@21.5,27 39.4,27 1.1
5V: C1.1 C20.2 C24.1 C79.2 L50.1 P2.1 R9.2 R12.2 U1.5 U1.6 U5.1 U5.3 U10.1 U10.3 USB2.1 | length 88.3
  Top Layer w0.381: v2(4.061,24) USB2.1 ; U10.3 17.406,4.071 17.018,3.683 17.018,2.54 17.308,2.25 C79.2 20.373,2.25 21.679,3.556 23.749,3.556 24.2,4.007 ; P2.1 24.2,4.007 ; U5.3 36.743,12.765 36.17,12.192 36.17,11.328 36.648,10.85 U5.1 37.6,10.95 C20.2 39.536,10.414 ; 39.903,7.552 39.057,7.552 38.792,7.817 R9.2 38.792,8.792 C24.1@39.525,9.525 ; C1.1 R12.2 ; L50.1 44.914,10.414 39.536,10.414 ; 24.2,4.007 24.45,3.757 29.665,3.757 35.433,9.525 C24.1@39.525,9.525 ; C24.1@39.525,9.525 C24.1 39.65,10.3 39.536,10.414
  Bottom Layer w0.381: v2(4.061,24) 3.684,23.623 3.684,21.275 3.718,21.241 3.718,20.771 3.684,20.737 3.684,3.174 4.887,1.971 20.132,1.971 v2(20.663,2.502)
7V: 5V.1 C15.1 C16.2 C17.1 C39.2 C68.2 C73.2 C89.2 OP1.7 OP2.7 R10.2 U3.1 U7.3 U9.3 | length 74.6
  Top Layer w0.254: U7.3 v2(39.949,37.775)
  Top Layer w0.381: v2(6.228,37.775) U9.3 ; OP2.7@19.45,42.449 C73.2 v2(19.45,45.015) ; v2(29.21,44.145) 29.565,44.5 C89.2 ; OP1.7 C89.2@29.965,44.485 ; U3.1 R10.2@47.937,27.629 ; R10.2 5V.1@47.954,30.146
  Bottom Layer w0.254: 39.35,42.85 C39.2 39.225,37.775 v2(39.949,37.775)
  Bottom Layer w0.381: v2(6.228,37.775) C68.2@7.175,37.775 ; 19.45,43.621 v2(19.45,45.015)
  Bottom Layer w1.524: 7.25,38.75 7.25,40.75 ; 7.5,41 10,43.5 40,43.5 47.8,35.7 5V.1
9V: C9.1 C10.1 C11.1 C13.2 C28.1 D1.2 R2.2 R11.2 U1.23 U3.5 U3.8 | length 28.1
  Top Layer w0.254: U1.23 43.45,6.05 C11.1 47.18,6.5 D1.2 ; U3.5 45.987,19.139 46.355,19.507 47.676,19.507 47.937,19.246 U3.8 C13.2@47.937,15.479 ; 46.008,12.992 46.952,12.992 49.301,10.643 49.301,7.214 48.538,6.45 C10.1
  Top Layer w0.381: R11.2 46.008,12.992 C13.2
-7V: -5V.1 C5.1 C6.2 C7.1 C37.2 C44.2 C72.2 C76.2 OP1.4 OP2.4 R1.2 U6.1 U7.6 U9.6 | length 52.3
  Top Layer w0.254: U9.6 v2(12.72,37.775) ; v2(42.743,37.775) U7.6
  Top Layer w0.381: OP2.4@21.919,37.45 C76.2 v2(24.348,37.45) ; OP1.4 C37.2@34.286,37.436 ; U6.1 R1.2@38.313,27.925 ; R1.2 -5V.1@38.322,29.978
  Bottom Layer w1: 42,35.5 43.35,36.85 C44.2 42.977,37.9
  Bottom Layer w1.524: 12,37.5 34,37.5 38,33.5 ; -5V.1 38,33.5 ; 42,35.5 40,35.5 38,33.5
  other v1: 34.112,37.16 34.011,37.922
-9V: C2.1 C12.2 C21.2 C22.1 C23.1 D2.1 R8.2 U1.15 U6.5 U6.8 | length 26
  Top Layer w0.254: U6.5 36.363,19.066 36.678,19.38 38.049,19.38 38.313,19.116 U6.8 ; C21.2 R8.2 ; R8.2@40.55,2.258 U1.15
  Top Layer w0.381: D2.1 v2(37.5,5.537) C23.1@37.5,7.25 ; v2@38.313,14.005 U6.8 ; v2(38.76,2.083) C21.2@39.7,2.083
  Bottom Layer w0.381: v2(38.202,13.894) 37.5,13.192 v2(37.5,5.537) 37.5,3.343 v2(38.76,2.083)
AGND: Ant1.GND Ant2.GND Ant3.GND Ant4.GND C2.2 C5.2 C6.1 C12.1 C13.1 C14.2 C15.2 C16.1 C18.1 C19.2 C20.1 C28.2 C29.1 C30.2 C31.1 C32.2 C33.2 C34.1 C36.1 C37.1 C39.1 C44.1 C46.1 C47.2 C48.1 C50.1 C51.2 C57.2 C58.1 C59.1 C60.2 C61.2 C62.1 C63.1 C64.2 C65.1 C68.1 C72.1 C73.1 C75.1 C76.1 C89.1 R3.1 R7.1 R16.1 R30.1 R32.1 R33.1 R34.2 R35.2 R36.2 R38.2 R39.2 R43.2 R44.2 R55.1 R56.1 R59.1 R60.1 R61.1 R67.1 U3.0 U3.4 U4.0 U4.4 U5.2 U6.0 U6.4 U8.1 U8.7 U8.12 U8.14 U8.30 U8.40 U8.45 U8.47 Y1.2 Y2.2 | length 33.5
  Top Layer w0.152: R33.1 R30.1 R32.1 15.621,17.557 v2(15.621,17.018) ; R44.2 17.377,13.892 C18.1 ; C65.1 v2(27.178,14.859) ; v2(30.099,10.779) Y1.2 v2(31.115,10.535) ; v2(30.099,16.129) R43.2 ; v2(31.242,9.763) Y2.2 v2(31.902,10.135) ; v2(33.782,16.002) 33.808,16.028 R34.2 R35.2 R36.2 R38.2 R39.2 ; v2(34.4,35.171) C37.1 ; C6.1 R3.1
  Top Layer w0.254: U8.14 19.744,25.341 v2(20.32,24.765) ; v2(20.287,25.687) U8.12 ; v2(21.336,17.399) 21.435,17.3 C46.1 22.787,18.087 U8.30 ; v2(22.787,25.708) U8.7 ; v2(25.654,22.479) 25.654,22.243 26.056,21.841 U8.40 ; v2(25.781,25.781) 25.781,27.11 U8.1 ; v2(25.824,24.341) U8.45 ; v2(25.908,25.146) 26.103,25.341 U8.47
  Bottom Layer w0.152: R61.1 R56.1 R60.1 R55.1 R59.1 v2(18.869,19.431)
  other v1: 36.83,11.811 38.1,11.811 33.02,12.319 38.608,12.827 39.497,12.827 33.528,12.954 40.64,13.081 35.687,14.478 45.72,14.732 40.767,15.113 35.687,15.621 45.72,15.748 37.211,16.129 40.767,16.129 19.685,16.256 47.244,16.256 42.291,16.51 34.671,16.637 44.577,16.637 37.211,16.891 39.751,17.018 47.244,17.018 42.291,17.272 36.576,19.984 38.1,19.984 46.2,20.1 47.724,20.1 41.338,20.292 42.862,20.292 37.338,20.492 46.962,20.608 42.1,20.8 36.576,21 38.1,21 46.2,21.116 47.724,21.116 41.338,21.308 42.862,21.308 34.798,21.463 11.176,21.59 36.195,21.844 45.847,21.971 41.021,22.098 11.176,23.876 34.798,23.876 36.449,23.876 46.101,24.003 41.275,24.384 21.463,24.511 22.225,24.511 24.003,24.511 24.638,24.511 15.875,24.638 30.226,24.638 46.482,24.765 36.678,24.841 35.814,25.019 41.478,25.121 40.513,25.273 46.482,25.527 35.687,25.654 36.703,25.654 15.875,25.781 30.226,25.781 41.529,25.908 46.05,26.34 11.176,26.543 41.148,26.67 45.593,26.924 33.274,28.956 34.798,28.956 11.176,29.083 22.606,30.658 23.393,30.658 22.606,31.369 23.368,31.369 22.428,35.027 33.35,35.052 24.155,35.585 23.317,35.611 33.96,35.763 8.763,37.211 9.906,37.211 40.894,37.465 41.91,37.465 8.763,38.227 9.906,38.227 40.894,38.481 41.91,38.481 31.877,44.882 21.488,44.907 31.09,44.983 20.676,45.034 7.01,45.999 48.031,46.05 11.862,46.076 40.081,46.076 16.993,46.101 1.981,46.177 35.027,46.177 42.901,46.177 1.945,47.606 6.945,47.606 11.851,47.606 16.851,47.606 34.965,47.606 39.965,47.606 42.966,47.606 47.966,47.606 11.862,48.971 34.9,49.073 16.764,49.124 47.854,49.149 1.905,49.2 39.903,49.225 42.901,49.276 6.96,49.301
GND: C1.2 C3.1 C4.1 C8.1 C9.2 C10.2 C22.2 C23.2 C24.2 C25.2 C26.2 C27.2 C53.1 C54.1 C55.1 C56.1 C78.2 C79.1 L1.2 P2.5 R4.1 R6.2 R15.2 R37.2 R67.2 U1.0 U1.2 U1.3 U1.9 U1.11 U1.19 U2.8 U2.23 U2.35 U2.47 U2.49 U10.2 USB2.5 X1.2 X1.4 | length 35.6
  Top Layer w0.305: v2(1.291,8.869) C4.1 1.8,8.277 X1.2 v2(2.106,7.8) ; v2(2.614,6.276) X1.4 ; C53.1 X1.4@2.966,5.887 ; U2.8 U2.49@7.55,6.25 ; USB2.5@5.25,21.4 6.311,21.4 v2(6.604,21.107) ; v2(5.461,12.446) 5.461,12.239 C55.1 ; U2.49@6.05,9.25 U2.47 ; R37.2 v2(7,13.32) ; v2(8.308,1.323) R15.2 ; U2.23 U2.49@10.55,4.75 ; U2.49@10.55,9.25 U2.35 ; v2(11.557,1.016) 11.557,1.612 C3.1 ; C56.1 13.034,1.016 v2(13.335,1.016) ; v2(13.556,3.843) C8.1 v2(14.536,3.556) ; R6.2 v2(17.946,5.5) ; v2(17.711,3.106) U10.2 v2(19.362,3.106) ; C79.1 v2(20,4.257) ; v2(26.8,4.391) 26.8,5.05 26.8,5.997 v2(27.127,6.325) ; U1.11 v1(39.425,4.55) v1(39.98,4.55) 40.05,4.55 U1.0@40.8,5.3 ; U1.9 39.55,5.55 U1.0@39.8,5.3 ; U1.0@39.8,4.8 U1.0@39.8,5.3 ; U1.3 41.05,6.55 v1(41.55,6.05) ; v1(41.55,4.55) U1.0@40.8,5.3 ; U1.2 v1(41.55,6.05) ; C25.2 41.608,8.942 C24.2 C1.2@42.35,9.4 ; U1.19 43.542,4.05 C26.2 ; U1.0@39.8,5.3 40.05,5.55 v1(40.05,6.05) U1.0@40.8,5.3 ; U1.0@40.8,5.3 v1(41.55,6.05)
  other v1: 42.697,0.94 23.825,1.372 27.051,1.372 44.577,2.134 25.5,2.15 27.28,2.87 23.724,2.896 44.933,3.378 43.942,3.454 43.282,3.886 46.812,4.572 47.549,4.572 45.745,4.597 36.271,4.928 33.172,5.004 34.519,5.004 46.076,5.385 35.433,5.969 35.408,6.731 35.408,7.569 41.529,8.687 42.088,9.296 41.504,9.398 41.402,11.176 1.6,21.006 3.15,21.006 2.35,22.7 3.15,24.46 1.575,24.536
  other v2: 13.97,9.398
  other v3: 6.1,4.8 7.2,4.8 8.3,4.8 9.4,4.8 10.5,4.8 6.1,5.9 7.2,5.9 8.3,5.9 9.4,5.9 10.5,5.9 6.1,7 7.2,7 8.3,7 9.4,7 10.5,7 6.1,8.1 7.2,8.1 8.3,8.1 9.4,8.1 10.5,8.1 6.1,9.2 7.2,9.2 8.3,9.2 9.4,9.2 10.5,9.2
KEY: R37.1 SW3.1 U2.44 U2.45 | length 8.8
  Top Layer w0.254: SW3.1 3.825,14.971 R37.1@6.996,11.8 ; R37.1 R37.1@6.996,11.8 ; U2.45 R37.1@7.05,11.746 ; U2.44 7.55,11.246 R37.1@7.05,11.746 ; R37.1@6.996,11.8 R37.1@7.05,11.746
NetAnt1_1: Ant1.1 C69.2 R49.2 | length 2.9
  Top Layer w0.381: R49.2 C69.2 ; C69.2@4.5,45.197 Ant1.1@4.5,46.351
NetAnt2_1: Ant2.1 C41.2 R19.2 | length 1.9
  Top Layer w0.254: R19.2 C41.2
NetAnt3_1: Ant3.1 C71.2 R63.2 | length 3
  Top Layer w0.381: R63.2 Ant3.1@14.3,46.558
NetAnt4_1: Ant4.1 C43.2 R31.2 | length 2.2
  Top Layer w0.254: R31.2 C43.2
NetC3_2: C3.2 U2.22 | length 1.9
  Top Layer w0.254: C3.2@10.05,1.65 U2.22
NetC4_2: C4.2 U2.5 X1.1 | length 2.7
  Top Layer w0.152: C4.2 2.808,8.347 X1.1 ; X1.1@3.405,7.75 U2.5
NetC7_2: C7.2 R1.1 R3.2 U6.2 | length 6.4
  Top Layer w0.254: R3.2 37.29,27.991 37.29,25.092 37.659,24.724 37.659,22.696 U6.2
NetC11_2: C11.2 R2.1 R4.2 U1.22 | length 2.8
  Top Layer w0.254: U1.22 44.75,5.55 44.75,4.758 R4.2
NetC14_1: C14.1 U3.6 | length 1.8
  Top Layer w0.254: 45.9,16.919 46.637,17.656 U3.6
NetC17_2: C17.2 R7.2 R10.1 U3.2 | length 6.2
  Top Layer w0.254: R7.2 45.954,27.9 R10.1 46.939,27.893 46.939,25.959 47.237,25.661 47.237,22.858 U3.2
NetC19_1: C19.1 U6.6 | length 2.2
  Top Layer w0.254: C19.1@35.938,16.737 36.422,17.221 36.779,17.221 37.013,17.455 U6.6
NetC21_1: C21.1 R5.1 R8.1 U1.16 | length 3.8
  Top Layer w0.254: C21.1 R8.1 40.445,1.1 41.4,2.055 R5.1 41.05,2.45 U1.16
NetC25_1: C25.1 R9.1 U1.4 U1.8 U1.10 | length 6.4
  Top Layer w0.152: U1.10 38.384,5.05 38.227,5.207 38.227,5.842 38.435,6.05 U1.8 39.324,6.05 39.37,6.096 39.37,6.593 39.505,6.729 40.384,6.729 40.55,6.895 U1.4
  Top Layer w0.254: R9.1 C25.1 40.55,8.15 U1.4
NetC26_1: C26.1 U1.21 | length 1.2
  Top Layer w0.254: U1.21 43.337,5.05 43.687,4.7 C26.1
NetC27_1: C27.1 U1.18 | length 1.9
  Top Layer w0.254: U1.18 42.05,2.979 42.33,2.698 42.802,2.698 C27.1
NetC29_2: C29.2 OP1.3 R17.1 R18.1 | length 3.7
  Top Layer w0.305: OP1.3@31.1,37.301 R18.1 C29.2 R17.1@32.092,34.575
NetC30_1: C30.1 C31.2 R11.1 R12.1 U4.5 U4.8 | length 10.3
  Top Layer w0.254: U4.5 41.125,19.357 41.427,19.66 42.774,19.66 43.075,19.358 U4.8 C31.2@43.075,15.841
  Top Layer w0.381: R12.1 42.5,14.784 C31.2 44,14.916 R11.1
NetC32_1: C32.1 U4.6 | length 1.8
  Top Layer w0.254: C32.1@41,17.175 41.471,17.646 41.522,17.646 41.775,17.899 U4.6
NetC35_2: C35.2 R14.1 R16.2 U4.2 | length 5.9
  Top Layer w0.254: R16.2 R14.1@41.992,28.008 ; R14.1 42.1,25.286 42.425,24.961 U4.2
NetC38_1: C38.1 R23.2 U7.4 | length 3.2
  Top Layer w0.254: C38.1@37.2,36.584 38.559,36.584 ; R23.2 38.559,36.257 38.559,36.584 ; U7.4 38.559,36.584
NetC38_2: C38.2 C40.2 R20.2 R22.1 U7.1 | length 8.7
  Top Layer w0.254: C40.2 35.941,34.157 35.941,37.357 37.2,38.616 37.659,39.075 U7.1 R22.1
NetC40_1: C40.1 R20.1 R23.1 R29.2 | length 21.9
  Top Layer w0.5: R29.2 24.5,31.866 25.146,32.512 40.259,32.512 40.767,33.02 40.767,33.274 40.357,33.684 R23.1 C40.1@37.732,33.684 ; R20.1 37.1,34.316 C40.1
NetC41_1: C41.1 R19.1 R22.2 | length 4.1
  Top Layer w0.254: R19.1 C41.1 38.108,41.208 R22.2
NetC42_1: C42.1 R24.1 U8.2 | length 4.2
  Top Layer w0.254: U8.2 25.287,28.819 C42.1 25.6,29.95 R24.1
NetC42_2: C42.2 R29.1 U8.3 | length 4.2
  Top Layer w0.254: R29.1 24.5,30.064 C42.2 24.787,28.731 U8.3
NetC43_1: C43.1 R27.2 R31.1 | length 4
  Top Layer w0.254: R27.2 44.992,41.108 C43.1 R31.1
NetC45_1: C45.1 R26.2 U7.5 | length 3.3
  Top Layer w0.254: R26.2 44.041,36.257 44.041,36.584 ; U7.5 44.041,36.584 ; C45.1 44.041,36.584
NetC45_2: C45.2 C49.2 R25.2 R27.1 U7.8 | length 8.7
  Top Layer w0.254: R27.1 U7.8 45.041,39.075 C45.2 46.863,37.253 46.863,34.353 C49.2
NetC47_1: C47.1 C48.2 U8.46 | length 4.4
  Top Layer w0.254: U8.46 C48.2@28.651,24.841 ; C48.2 28.792,24.593 C47.1
NetC49_1: C49.1 R24.2 R25.1 R26.1 | length 21.3
  Top Layer w0.5: R24.2 41.624,31.808 R26.1 C49.1@45.068,33.684 ; C49.1@45.6,34.216 R25.1
NetC52_1: C52.1
NetC52_2: C52.2 U2.29 | length 1.9
  Top Layer w0.254: U2.29 11.75,6.287 13.179,6.287 C52.2
NetC53_2: C53.2 U2.6 X1.3 | length 5.4
  Top Layer w0.203: C53.2 1.958,5.641 X1.3 2.193,7.146 4.85,7.146 U2.6
NetC61_1: C61.1 C62.2 U8.15 | length 4.6
  Top Layer w0.254: C61.1@15.315,22.707 C62.2 17.449,24.841 U8.15
NetC66_1: C66.1 R45.1 R53.1 R62.2 | length 17
  Top Layer w0.5: R45.1 4.8,34.716 C66.1 R53.1@7.084,33.9 ; R53.1 9.176,31.808 R62.2
NetC66_2: C66.2 C67.2 R45.2 R52.1 U9.1 | length 8.7
  Top Layer w0.381: C66.2 3.584,37.1 C67.2 5.559,39.075 U9.1 R52.1
NetC67_1: C67.1 R53.2 U9.4 | length 3.3
  Top Layer w0.381: C67.1 6.659,36.584 ; R53.2 6.659,36.357 6.659,36.584 ; U9.4 6.659,36.584
NetC69_1: C69.1 R49.1 R52.2 | length 5.2
  Top Layer w0.381: R49.1 C69.1 5.208,41.108 R52.2
NetC70_1: C70.1 R54.1 U8.10 | length 4.2
  Top Layer w0.254: U8.10 21.287,28.771 C70.1 21.6,29.916 R54.1
NetC70_2: C70.2 R62.1 U8.11 | length 4.2
  Top Layer w0.254: C70.2 20.787,28.697 U8.11 ; C70.2@20.3,29.317 R62.1
NetC71_1: C71.1 R58.2 R63.1 | length 5.2
  Top Layer w0.381: R58.2 13.592,41.108 C71.1 R63.1
NetC74_1: C74.1 R57.2 U9.5 | length 3.2
  Top Layer w0.381: R57.2 12.141,36.357 12.141,36.584 ; U9.5 12.141,36.584 ; C74.1 12.141,36.584
NetC74_2: C74.2 C77.2 R58.1 R65.2 U9.8 | length 8.6
  Top Layer w0.381: R58.1 U9.8 13.141,39.075 C74.2 15.216,37 C77.2
NetC75_2: C75.2 OP2.3 R64.1 R66.1 | length 4.2
  Top Layer w0.381: OP2.3 20.635,35.635 R66.1 C75.2 21.392,34.353 R64.1
NetC77_1: C77.1 R54.2 R57.1 R65.1 | length 17.3
  Top Layer w0.381: C77.1 14,34.716 R65.1
  Top Layer w0.5: C77.1 10.659,33.9 10.16,33.401 10.16,32.893 10.541,32.512 20.896,32.512 R54.2
NetC78_1: C78.1 R5.2 U1.17 | length 3
  Top Layer w0.254: R5.2 41.933,1.625 42.011,1.625 C78.1@42.4,2.014 ; U1.17 41.55,2.904 42.354,2.1 C78.1
NetD1_1: D1.1 L50.2 U1.1 U1.24 | length 3.1
  Top Layer w0.381: L50.2@46.02,7.7 D1.1
NetD2_2: D2.2 L1.1 U1.13 U1.14 | length 1.3
  Top Layer w0.508: L1.1@36.373,2.083 36.728,2.438 37.318,2.438 D2.2
NetLED1_1: LED1.1 U8.38 | length 3.5
  Top Layer w0.152: U8.38 27.8,20.841 28.9,19.741 LED1.1
NetLED1_2: LED1.2 R43.1 | length 1.5
  Top Layer w0.152: LED1.2 29.709,17.645 R43.1
NetLED2_1: LED2.1 U8.37 | length 12.7
  Top Layer w0.152: LED2.1@17.124,17.526 v2(19.177,17.526) ; U8.37 27.559,19.844 v2(27.559,18.796)
  Bottom Layer w0.152: v2(19.177,17.526) 20.447,18.796 v2(27.559,18.796)
NetLED2_2: LED2.2 R44.1 | length 1.2
  Top Layer w0.152: R44.1 LED2.2
NetLED3_1: LED3.1 U2.28 | length 1.5
  Top Layer w0.152: U2.28 LED3.1@13.2,5.75
NetLED3_2: LED3.2 R6.1 | length 1.2
  Top Layer w0.381: LED3.2 R6.1
NetR13_1: R13.1 U8.34 | length 10.7
  Top Layer w0.203: R13.1 22.542,11.112 24.384,12.954 24.384,14.543 24.787,14.946 U8.34
NetR13_2: R13.2 U8.33 | length 10
  Top Layer w0.203: R13.2 22.534,11.612 24.003,13.081 24.003,14.665 24.287,14.949 U8.33
NetR13_3: R13.3 U8.32 | length 9.3
  Top Layer w0.203: R13.3 22.526,12.112 23.495,13.081 23.495,14.859 23.787,15.151 U8.32
NetR13_6: R13.6 U2.41 | length 11.8
  Top Layer w0.254: U2.41 9.05,11.209 9.906,12.065 R13.6@19.689,12.065
NetR13_7: R13.7 U2.39 | length 10.4
  Top Layer w0.254: U2.39 10.05,11.006 10.63,11.586 R13.7@19.668,11.586
NetR15_1: R15.1 U2.20 | length 1.1
  Top Layer w0.152: R15.1@9.05,2.489 U2.20
NetR21_1: R21.1 SW3.2 | length 1.6
  Top Layer w0.254: SW3.2 2,11.375 R21.1
NetR28_2: R28.2 U8.16 | length 4.2
  Top Layer w0.152: U8.16 19.012,24.286 20.164,24.286 v2(21.844,22.606)
  Bottom Layer w0.152: R28.2@21.844,21.952 v2(21.844,22.606)
NetR30_2: R30.2 U8.23 | length 5.9
  Top Layer w0.152: R30.2 14.408,19.488 14.986,20.066 17.195,20.066 17.97,20.841 U8.23
NetR32_2: R32.2 U8.24 | length 4.5
  Top Layer w0.152: R32.2 15.408,19.218 15.951,19.761 18.433,19.761 U8.24
NetR33_2: R33.2 U8.22 | length 6.9
  Top Layer w0.152: R33.2 13.408,19.123 14.732,20.447 17.145,20.447 18.039,21.341 U8.22
NetR34_1: R34.1 U8.39 | length 7.7
  Top Layer w0.152: U8.39 27.987,21.341 32.728,16.6 R34.1
NetR35_1: R35.1 U8.41 | length 8.3
  Top Layer w0.152: U8.41 28.285,22.341 28.782,21.844 28.782,20.977 32.259,17.5 R35.1
NetR36_1: R36.1 U8.42 | length 8.4
  Top Layer w0.152: U8.42 28.725,22.841 29.087,22.479 29.087,21.103 31.79,18.4 R36.1
NetR38_1: R38.1 U8.43 | length 8.5
  Top Layer w0.152: U8.43 29.06,23.341 29.392,23.009 29.392,21.229 31.321,19.3 R38.1
NetR39_1: R39.1 R40.1 U8.44 | length 8.3
  Top Layer w0.152: U8.44 28.991,23.841 29.696,23.136 29.696,21.355 30.852,20.2 R39.1
NetR41_1: R41.1 U8.35 | length 1.5
  Top Layer w0.152: R41.1@25.287,17.613 U8.35
NetR41_2: R41.2 Y1.3 Y2.3 | length 8.2
  Top Layer w0.152: R41.2 26.271,15.621 27.829,15.621 Y1.3 31.023,13.503 Y2.3
NetR42_1: R42.1 U8.36 | length 2.8
  Top Layer w0.152: v2(25.146,20.828) 25.787,20.187 U8.36
  Bottom Layer w0.152: R42.1@24.372,20.828 v2(25.146,20.828)
NetR46_2: R46.2 R59.2 U8.21 | length 7.7
  Top Layer w0.152: v2(17.653,19.05) 17.751,18.952 19.067,18.952 19.348,19.233 19.348,19.475 20.32,20.447 20.32,21.463 19.942,21.841 U8.21
  Bottom Layer w0.152: R46.2 R59.2 17.592,19.111 v2(17.653,19.05)
NetR47_1: R47.1 R55.2 U8.20 | length 4.2
  Top Layer w0.152: v2(16.51,20.955) 16.51,21.082 17.769,22.341 U8.20
  Bottom Layer w0.152: R47.1 R55.2
NetR48_1: R48.1 R60.2 U8.19 | length 3.8
  Top Layer w0.152: v2(16.637,21.971) 17.507,22.841 U8.19
  Bottom Layer w0.152: R48.1 R60.2
NetR50_1: R50.1 R56.2 U8.18 | length 3.5
  Top Layer w0.152: v2(16.637,22.733) 16.862,22.733 17.47,23.341 U8.18
  Bottom Layer w0.152: v2(16.637,22.733) R56.2@17.559,22.733
NetR51_2: R51.2 R61.2 U8.17 | length 3.2
  Top Layer w0.152: v2(17.11,23.657) 17.11,23.841 U8.17
  Bottom Layer w0.152: R51.2 R61.2
NetU2_2: U2.2
NetU2_3: U2.3
NetU2_12: U2.12
NetU2_40: U2.40
PA9: U2.30
PA10: U2.31
PA11: U2.32 USB2.2 | length 21.6
  Top Layer w0.203: USB2.2@5.268,23.368 v2(6.604,23.368) ; U2.32 12.238,7.75 12.622,7.366 v2(13.081,7.366)
  Bottom Layer w0.203: v2(6.604,23.368) 13.204,16.768 13.204,7.489 v2(13.081,7.366)
PA12: U2.33 USB2.3 | length 19.5
  Top Layer w0.203: USB2.3 v2(6.51,22.7) ; U2.33 12.451,8.25 v2(12.7,8.001)
  Bottom Layer w0.203: v2(6.51,22.7) 12.827,16.383 v2@12.827,8.128
PA13: P2.3 U2.34 | length 15.7
  Top Layer w0.152: U2.34 v2@14.973,8.75 ; v2(16.51,8.763) 16.891,8.382 19.1,8.382 20.954,6.528 24.8,6.528 25.5,5.828 P2.3
  Bottom Layer w0.152: v2(14.986,8.763) v2(16.51,8.763)
PA14: P2.2 U2.37 | length 16.9
  Top Layer w0.152: U2.37 11.05,10.542 11.303,10.795 13.716,10.795 16.51,8.001 19.05,8.001 20.828,6.223 24.638,6.223 24.85,6.011 P2.2
PA15: R13.8 U2.38 | length 9.7
  Top Layer w0.254: U2.38 10.55,10.931 10.798,11.179 R13.8@19.625,11.179
VCML: OP2.2 OP2.6 R66.2 U9.2 | length 20.6
  Top Layer w0.381: U9.2 8.158,38.425 9.433,39.7 v2(9.525,39.7) ; R66.2 19.392,38.848 20.635,40.091 OP2.6
  Bottom Layer w0.381: v2(9.525,39.7) 10.135,39.091 v2(19.558,39.091)
VCMR: OP1.2 OP1.6 R18.2 U7.2 | length 17.1
  Top Layer w0.254: OP1.2 29.965,38.957 31.235,40.227 OP1.6 ; R18.2 OP1.2@30.092,37.309 ; v2(37.592,37.592) 37.622,37.592 38.455,38.425 U7.2
  Bottom Layer w0.254: v2(30.48,39.497) 35.687,39.497 v2(37.592,37.592)
VCOML: C63.2 C64.1 R64.2 U8.13 | length 13.3
  Top Layer w0.254: C63.2@15.38,27.8 17.241,25.939 17.241,25.841 U8.13
  Top Layer w0.381: v2(17.602,34.315) R64.2
  Bottom Layer w0.381: v2(15.926,28.981) 17.602,30.658 v2(17.602,34.315)
VCOMR: C50.2 C51.1 R17.2 U8.48 | length 10.7
  Top Layer w0.254: U8.48 C51.1@28.759,25.841 ; C51.1 28.8,26.015 C50.2 ; C50.2@31.115,28.33 v2(31.115,29.464) ; v2(31.115,33.528) R17.2
  Bottom Layer w0.254: v2(31.115,29.464) v2(31.115,33.528)
pads on no net: OP1.1 OP1.5 OP1.8 OP2.1 OP2.5 OP2.8 P2.4 R13.4 R13.5 SW3.3 SW3.4 U1.7 U1.12 U1.20 U2.4 U2.7 U2.10 U2.11 U2.13 U2.14 U2.15 U2.16 U2.17 U2.18 U2.19 U2.21 U2.25 U2.26 U2.27 U2.42 U2.43 U2.46 U3.3 U3.7 U4.3 U4.7 U5.4 U6.3 U6.7 U7.7 U8.5 U8.6 U8.8 U8.25 U8.26 U8.27 U8.28 U8.29 U9.7 U10.4 USB2.4 Y1.1 Y2.1

## Polygon pours and split planes (outlines as drawn)
GND on GND (split plane): 23.316,7.822 23.318,7.821 23.319,7.819 23.372,7.778 23.434,7.753 23.5,7.744 37,7.744 37.066,7.753 37.128,7.778 37.181,7.819 43.106,13.744 49.49,13.744 49.49,0.51 0.51,0.51 0.51,30.627
AGND on GND (split plane): 49.49,14.256 43,14.256 42.934,14.247 42.916,14.24 42.872,14.222 42.819,14.181 36.894,8.256 23.606,8.256 0.51,31.352 0.51,49.49 3.945,49.49 3.945,45.59 4.945,45.59 4.945,49.49 13.851,49.49 13.851,45.59 14.851,45.59 14.851,49.49 36.965,49.49 36.965,45.59 37.965,45.59 37.965,49.49 44.966,49.49 44.966,45.59 45.966,45.59 45.966,49.49 49.49,49.49

## Keep-outs
Keep-Out Layer:
  the board outline again, w0.305

## Other copper
Top Layer:
  rectangle net NetD2_2: 37.465,2.591 40.183,3.048
  rectangle net NetD1_1: 42.164,6.655 43.383,8.23
GND (plane layer: these items are gaps in the copper):
  lines w0.305: 0,31.5 0,32.5
  lines w0.508: 0,31.5 23.497,8.003 ; 23.5,8 37,8 43,14 50,14

## Text inside footprints (layer, text, board x,y; h text height)
OP1: Top Overlay "*" at 28.06,37.868 h1.27 r90
OP2: Top Overlay "*" at 17.46,37.868 h1.27 r90
R13: Mechanical 1 "R1" at 20.013,12.061 h0.3 r270